# Altium PCB PCB1.PcbDoc (part 1 of 2)
Units mil, origin at the board's own origin, x right, y up, seen from the top; angles counter-clockwise.
Board outline 2600 x 2600 mil, 4 copper layers (Top Layer, Layer 1, Layer 2, Bottom Layer), stack 68.756 mil thick; 81 components, 85 nets, 321 pads, 126 vias.
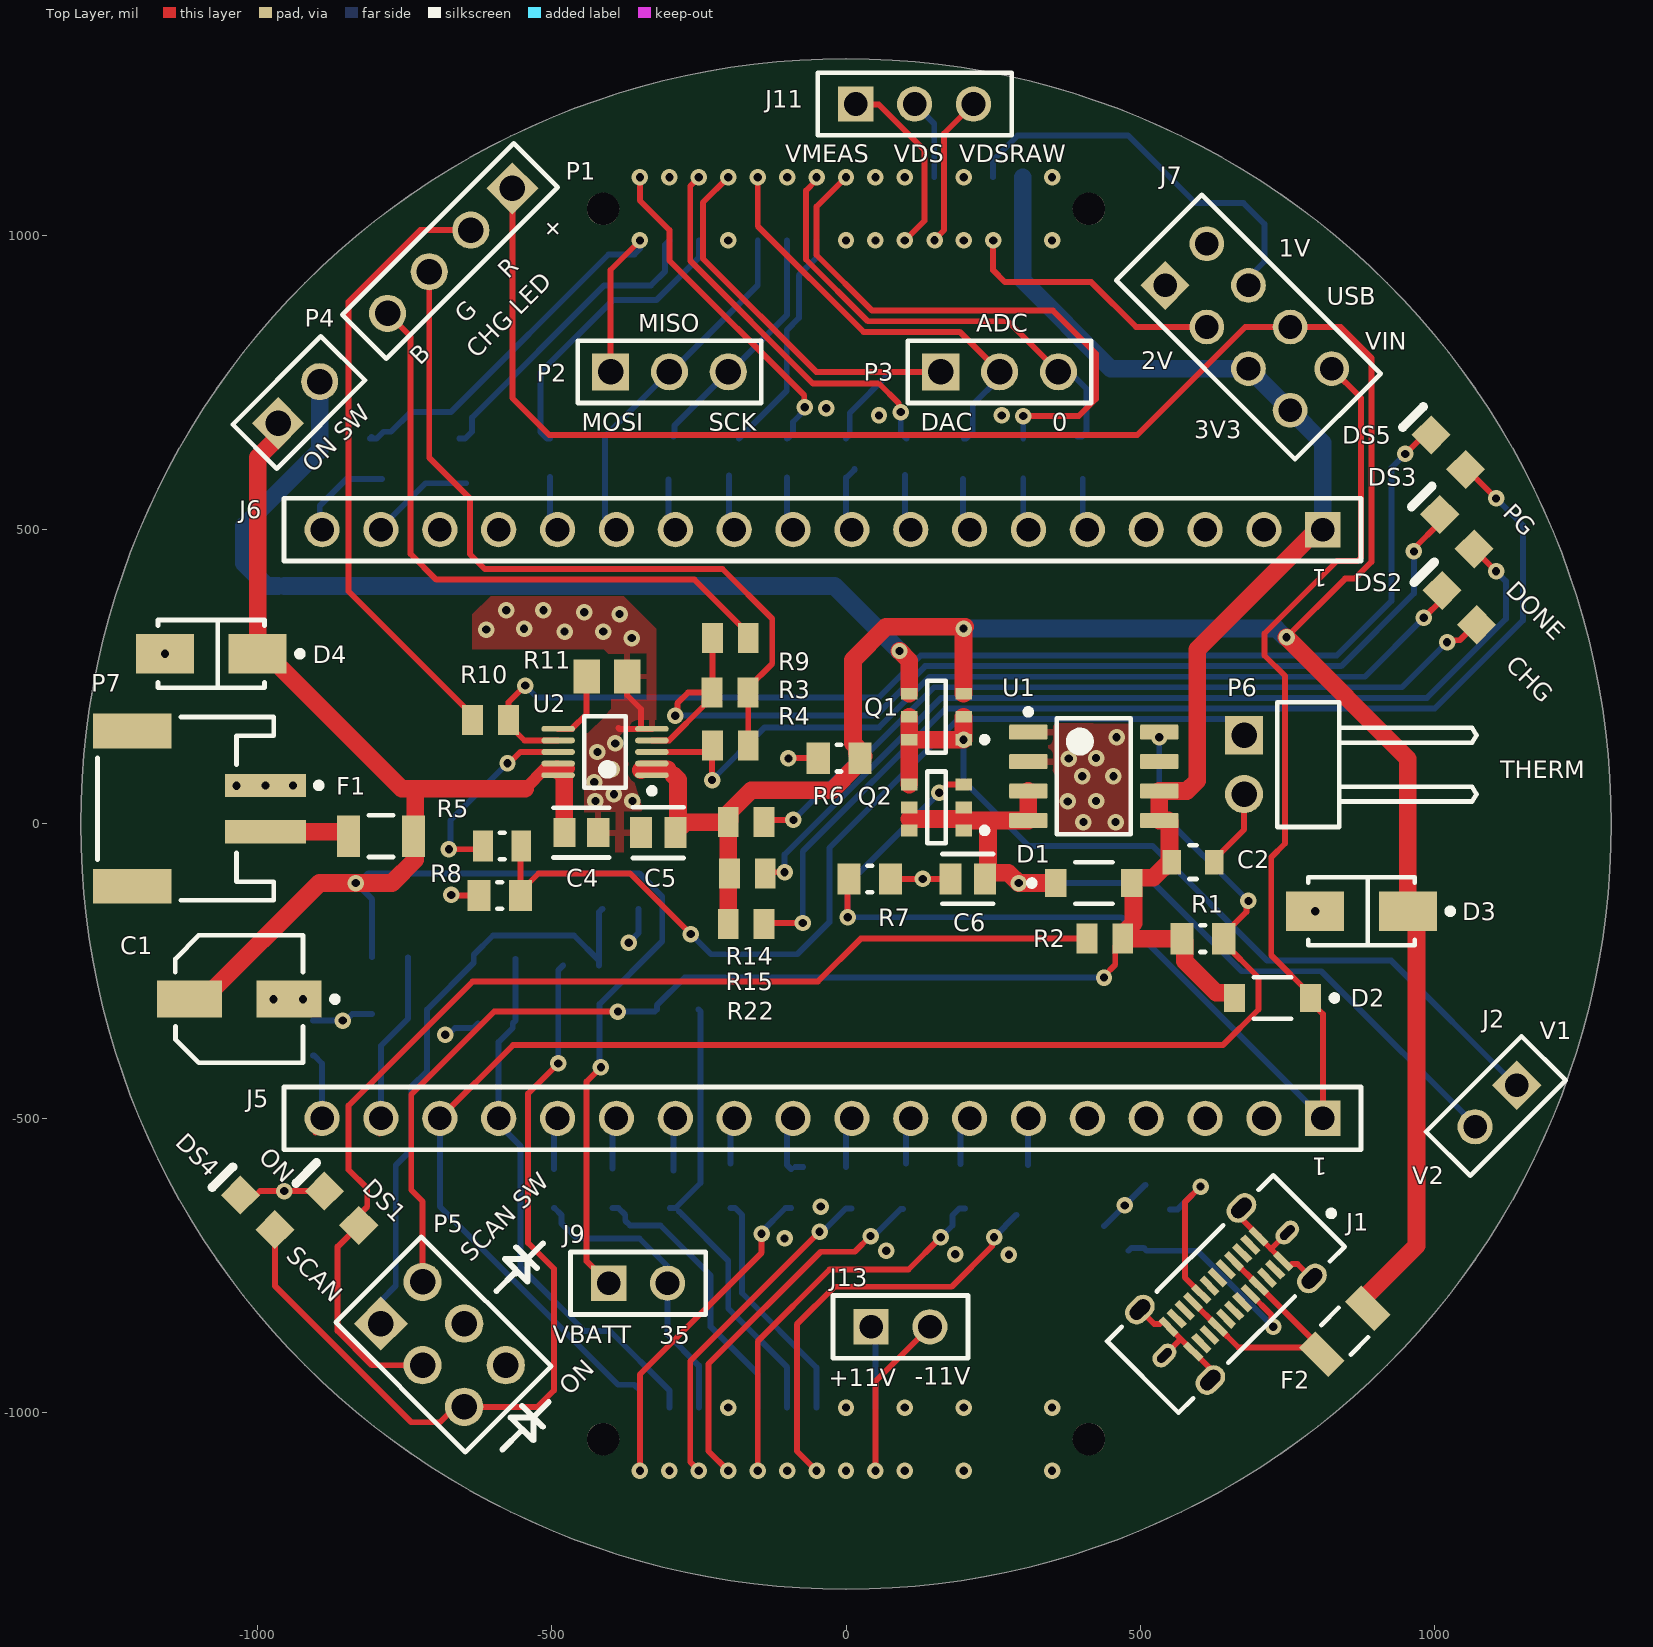
[diagram p0: Top Layer view]
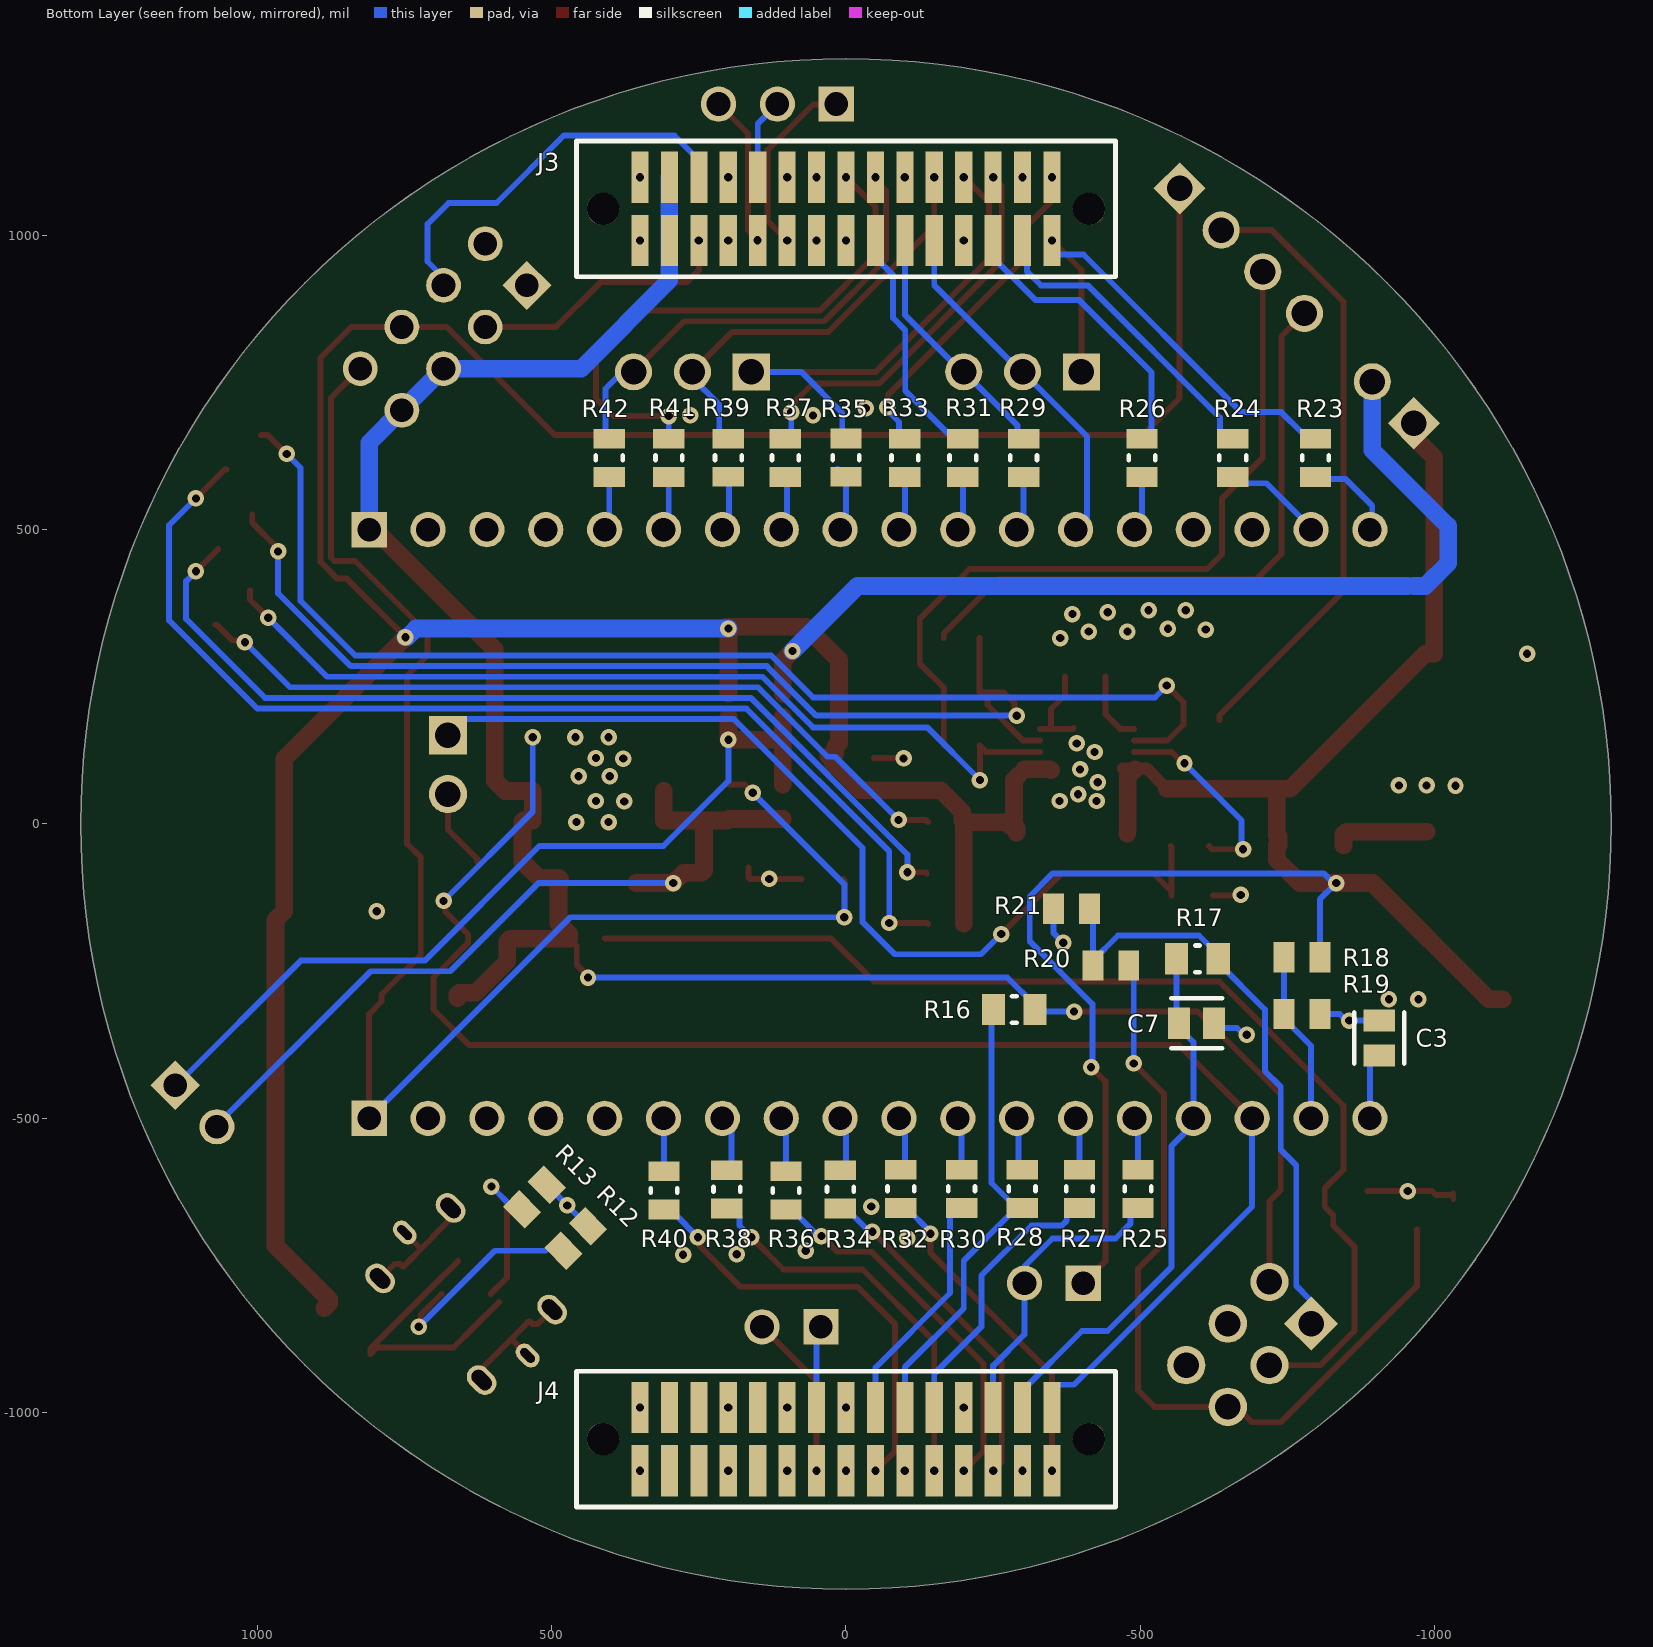
[diagram p1: Bottom Layer view, seen from below]
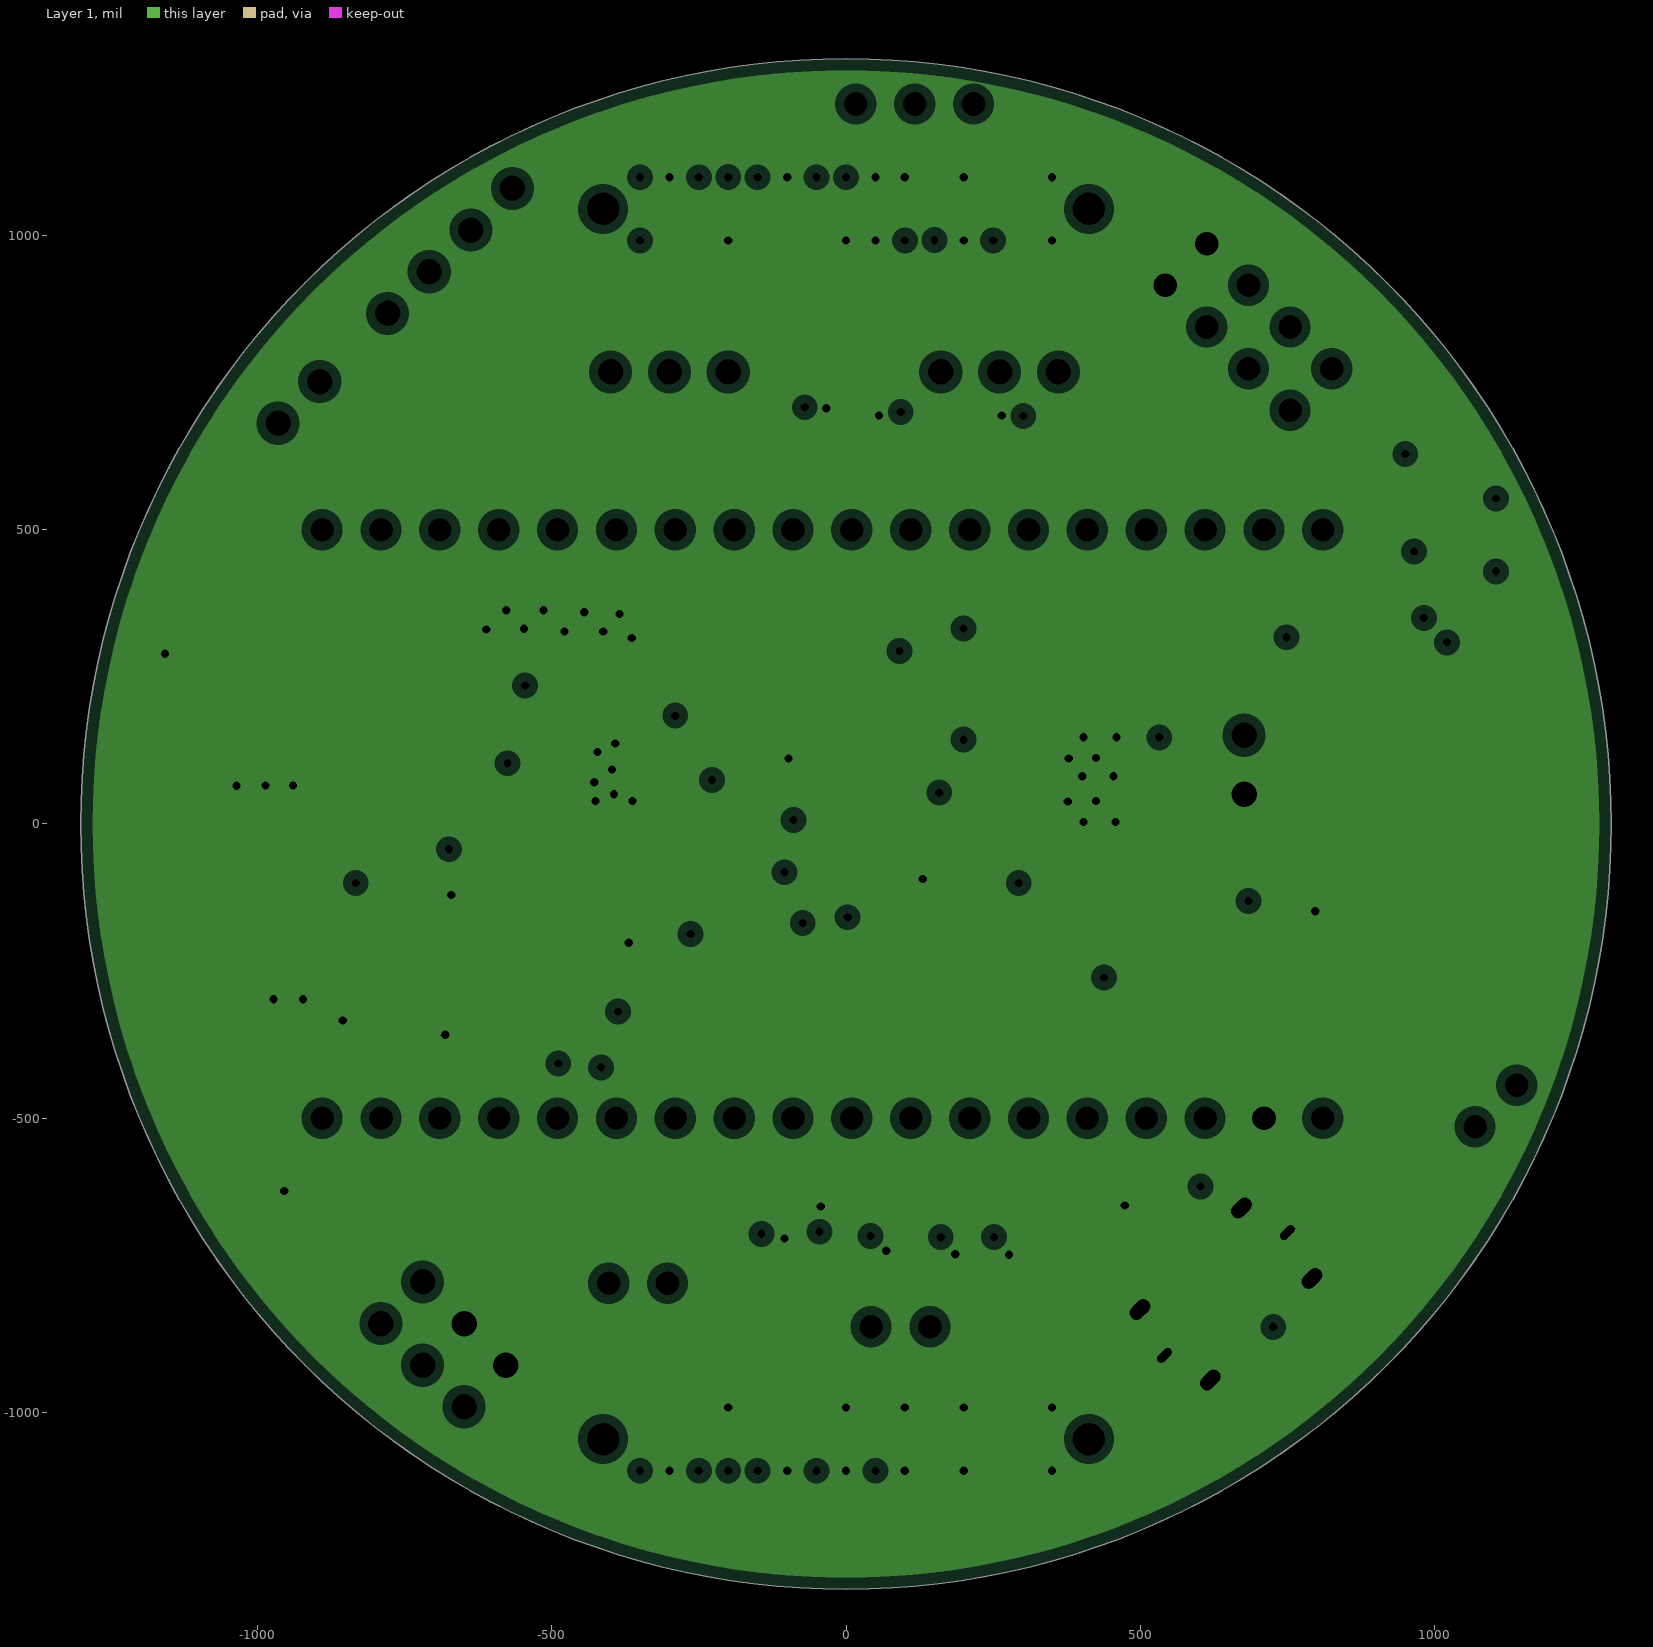
[diagram p2: Layer 1, clearances drawn from the general rule]
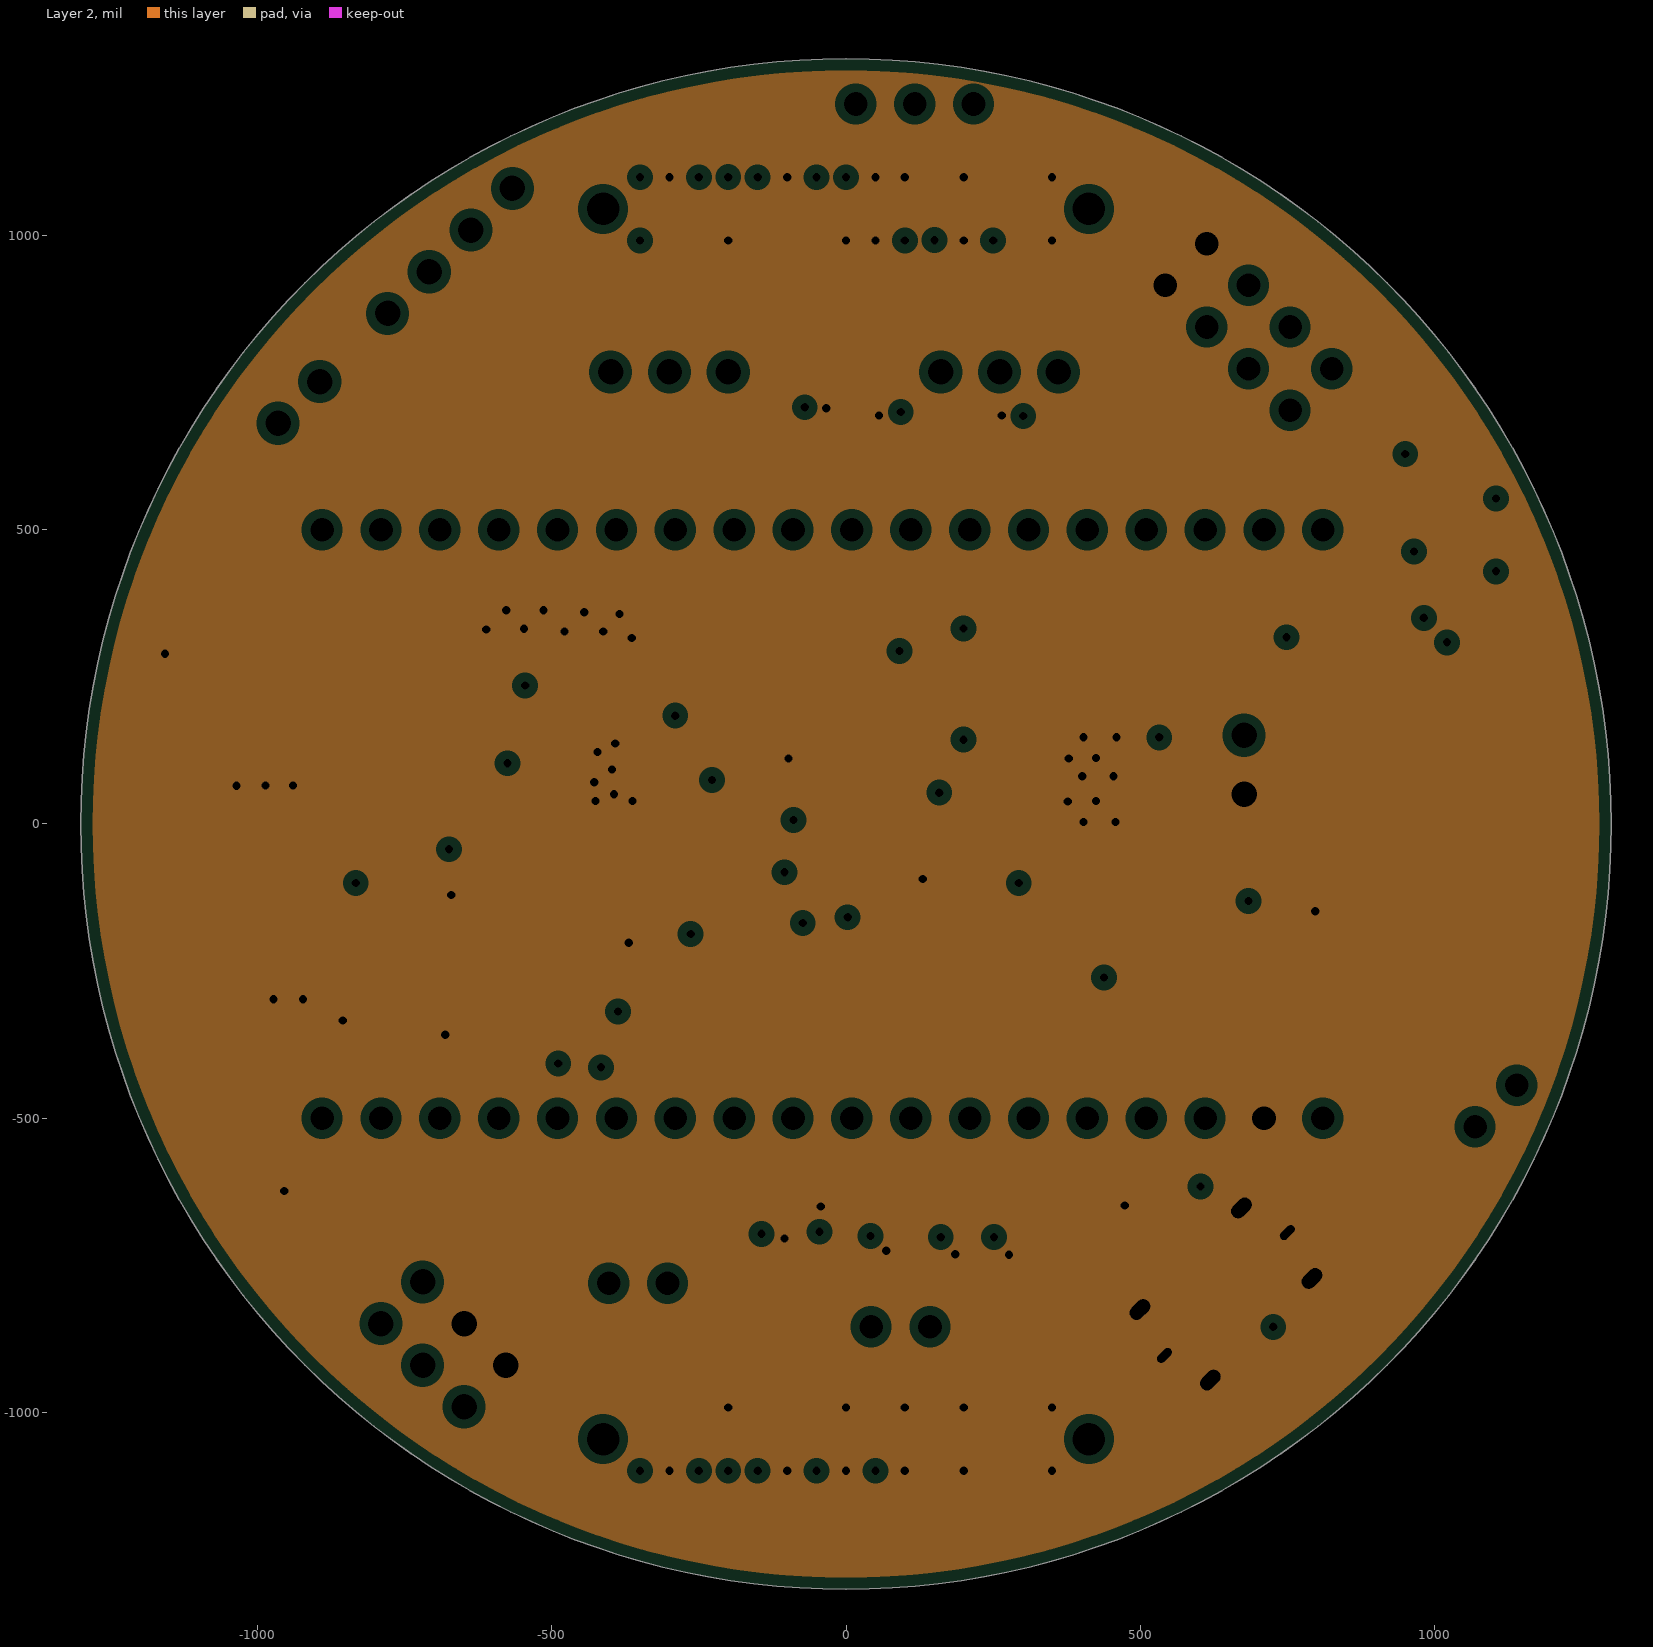
[diagram p3: Layer 2, clearances drawn from the general rule]
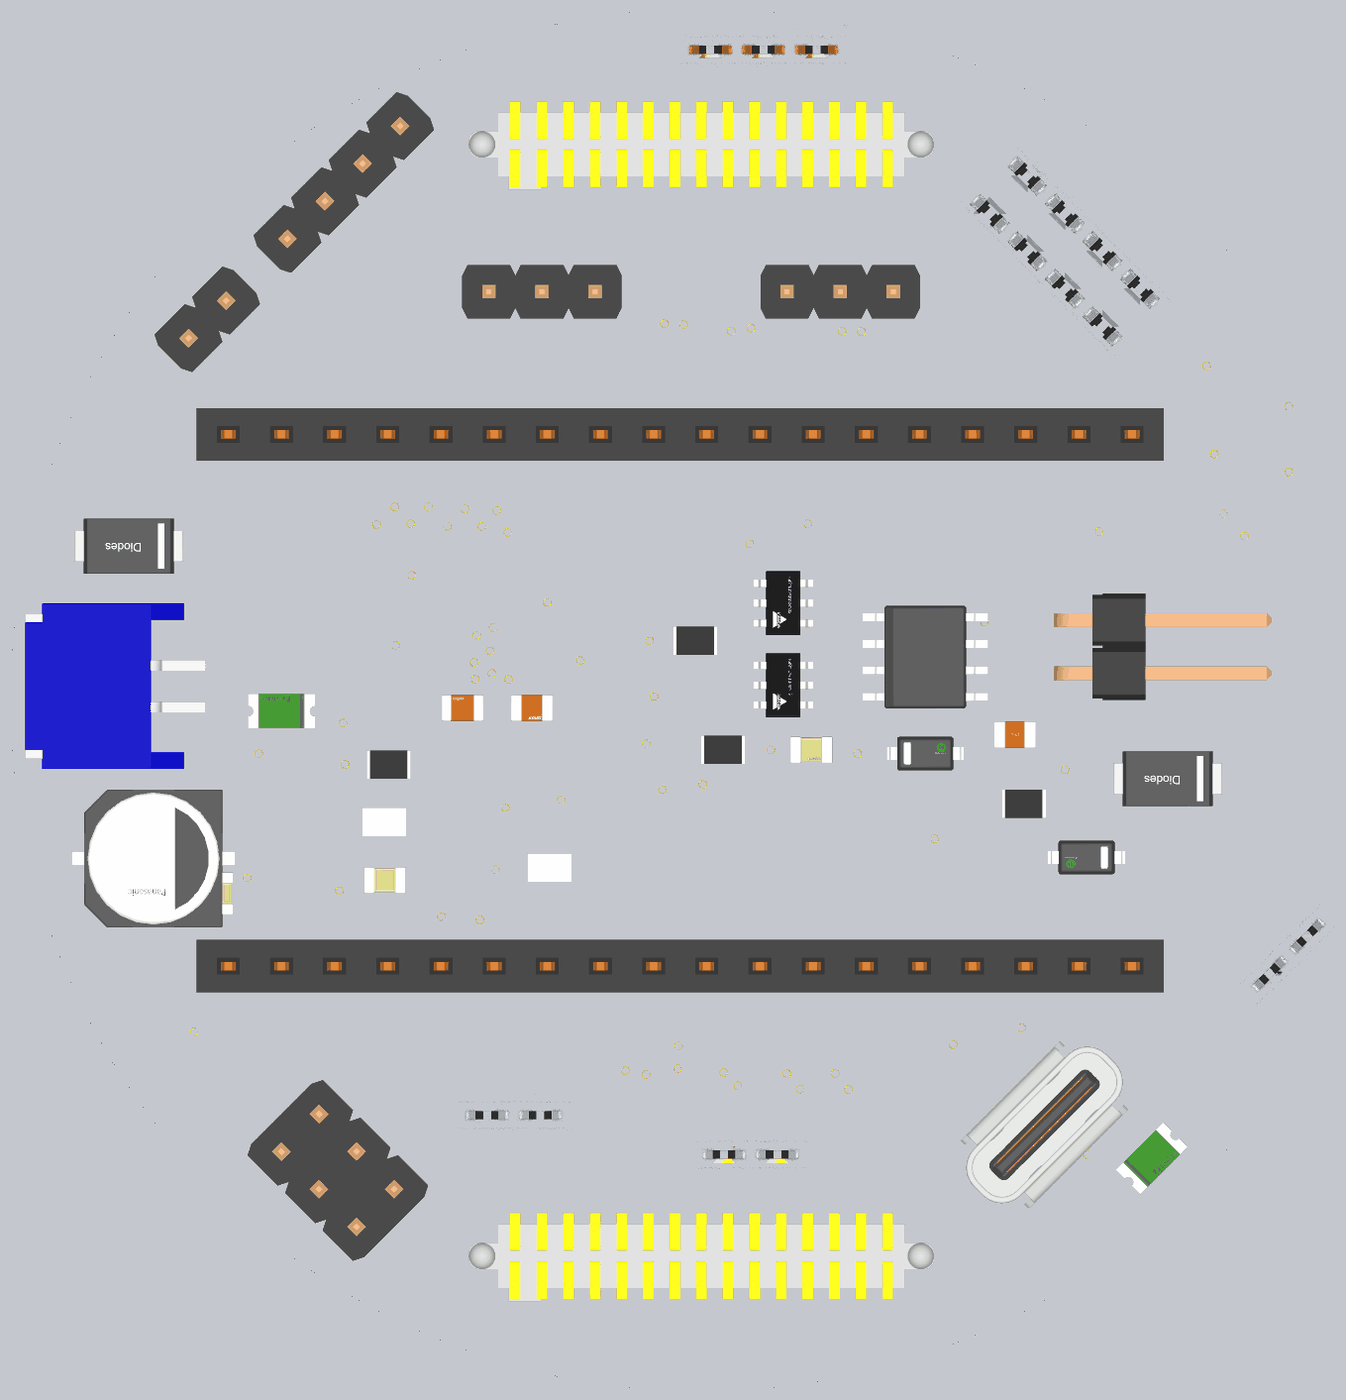
[diagram p4: 3D render of the assembled board from above, using the file's embedded part models]

## Layer stack, top to bottom
Top Solder: solder mask 0.5, Solder Resist, Dk 3.3
Top Layer: signal copper 0.7
Dielectric 1: prepreg 2.8, PP-006, Dk 4.1
Layer 1: plane copper 1.378, net GND
Dielectric1: core 59, FR-4, Dk 4.3
Layer 2: plane copper 1.378, net GND
Dielectric 2: prepreg 2.8, PP-006, Dk 4.1
Bottom Layer: signal copper 0.7
Bottom Solder: solder mask 0.5, Solder Resist, Dk 3.3

## Board outline
-1300,0 ccw(c0,0) 0,-1300 ccw(c0,0) 1300,0 ccw(c0,0) 0,1300 ccw(c0,0)

## Design rules (kind name [scope] priority, off if disabled: settings)
Clearance [All] p1: gap=8 ignorepadtopadclearanceinfootprint=FALSE except(6: SMDPad-SMDPad; 12: Arc-Via Track-Via)
DiffPairsRouting [All] p1: maxlimit=10 minlimit=10 mostfreqgap=10 toplayer_minwidth=10 toplayer_maxwidth=10 toplayer_prefwidth=10 bottomlayer_minwidth=10 bottomlayer_maxwidth=10 bottomlayer_prefwidth=10 maxuncoupledlength=500
HoleSize [All] p1: absolutevalues=TRUE maxlimit=300 minlimit=13 maxpercent=80.000 minpercent=20.000
MinimumAnnularRing [All] p1: minimumring=6
MinimumSolderMaskSliver [All] p1: minsoldermaskwidth=2
PasteMaskExpansion [All] p1: expansion=10
PlaneClearance [All] p1: clearance=15
PlaneConnect [All] p1: pad.planeconnectstyle=Relief pad.reliefexpansion=20 pad.reliefentries=4 pad.reliefconductorwidth=10 pad.reliefairgap=10 via.planeconnectstyle=Direct via.reliefexpansion=20 via.reliefentries=4 via.reliefconductorwidth=10 via.reliefairgap=10
PolygonConnect [All] p1: thpad.connectstyle=Relief thpad.reliefconductorwidth=10 thpad.reliefentries=4 thpad.polygonreliefangle="90 Angle" thpad.airgapwidth=10 smdpad.connectstyle=Relief smdpad.reliefconductorwidth=10 smdpad.reliefentries=4 smdpad.polygonreliefangle="90 Angle" smdpad.airgapwidth=10 via.connectstyle=Direct via.reliefconductorwidth=10 via.reliefentries=4 via.polygonreliefangle="90 Angle" via.airgapwidth=10
RoutingVias [All] p1: holewidth=14 width=28 viastyle="Through Hole" minholewidth=14 minwidth=28 maxholewidth=14 maxwidth=28
SMDNeckDown [All] p1: percent=150.000
SilkToSilkClearance [All] p1: silktosilkclearance=5
SilkToSolderMaskClearance SilkscreenOverComponentPads [IsPad] p1: minsilkscreentomaskgap=7 clearancetoexposedcopper=TRUE
SolderMaskExpansion [All] p1: expansion=10 istentingtop=FALSE
Width [All] p1: maxlimit=30 minlimit=8 preferedwidth=8
22 further rules are at their usual default settings.

## Classes and differential pairs
component class ESP32: 45

## Components (designator, comment, footprint, x,y, rotation, side; value= is the part's Value field where it differs from the comment)
C1 "22uF" FP-FKC-MFG -1030.64,-297.57 r180 top
C2 "15uF" FP-C2012-125-0_2-MFG 589.5,-64.81 r0 top
C3 "100 nF" FP-C0805C-DN-MFG -905.75,-363.47 r270 bottom value="0.10 μF"
C4 "10uF" FP-GRM21B-0_1-IPC_C -449.36,-14.56 r180 top
C5 "4.7 uF" FP-C0805C475K3PACTU-MFG -319.05,-14.56 r0 top
C6 "100 nF" FP-C0805C-DN-MFG 206.64,-93.36 r180 top value="0.10 μF"
C7 "100 nF" FP-C0805C-DN-MFG -595.61,-338.59 r180 bottom value="0.10 μF"
D1 "MBR0530" FP-425-04-MFG 420.94,-100.29 r0 top
D2 "MBR0530" FP-425-04-MFG 724.41,-295.6 r180 top
D3 "SMAJ5.0A-13-F" FP-SMA-MFG 875.78,-148.21 r180 top
D4 "SMAJ5.0A-13-F" FP-SMA-MFG -1078.27,289.07 r180 top
DS1 "HSMD-C170" AVAG-HSMX-C170_V -856.89,-652.78 r135 top
DS2 "HSMD-C170" AVAG-HSMX-C170_V 1042,367.67 r135 top
DS3 "HSMD-C170" AVAG-HSMX-C170_V 1037.88,496.67 r135 top
DS4 "HSMD-C170" AVAG-HSMX-C170_V -999.53,-659.74 r135 top
DS5 "HSMD-C170" AVAG-HSMX-C170_V 1023.21,631.59 r135 top
F1 "1206L150THWR" FP-1206L150THWR-MFG -789.89,-20.59 r180 top value=0.04-0.12Ω
F2 "1206L150THWR" FP-1206L150THWR-MFG 847.13,-861.61 r45 top value=0.04-0.12Ω
J1 "204711-0001" FP-204711-0001-MFG 645.3,-798.39 r225 top
J2 "61300211821" 61300211821 1104,-479 r225 top
J3 "SAMTEC-SFM-115-02-X-D-A" SAMTEC-SFM-115-02-X-D-A 0,1045 r180 bottom locked
J4 "SAMTEC-SFM-115-02-X-D-A" SAMTEC-SFM-115-02-X-D-A 0,-1045 r180 bottom locked
J5 "61301811821" 61301811821 -40,-500 r180 top locked
J6 "61301811821" 61301811821 -40,500 r180 top
J7 "61300821821" 61300821821 683.69,844.28 r315 top
J9 "61300211821" 61300211821 -353.21,-780.1 r0 top
J11 "61300311821" 61300311821 116.57,1223 r0 top
J13 "61300211821" 61300211821 92.6,-854.21 r0 top
P1 "61300411121" 61300411121 -672.66,973.5 r225 top
P2 "61300311121" 61300311121 -300,768.1 r0 top
P3 "61300311121" 61300311121 260.94,768.1 r0 top
P4 "61300211121" 61300211121 -929.41,716.1 r45 top
P5 "61300621121" 61300621121 -684,-884 r315 top
P6 "61300211021" 61300211021 785.23,100.75 r90 top
P7 "S2B-PH-SM4-TB(LF)(SN)" "JST- S2B-PH-SM4-TB(LF)(SN)-2_V" -1122.01,26.16 r270 top
Q1 "SI3493DDV-T1-GE3" FP-C-06593-MFG 153.72,182.29 r180 top
Q2 "SI3493DDV-T1-GE3" FP-C-06593-MFG 153.72,28.13 r180 top
R1 "10k" RESC2013X60X35NL10T20 606.24,-194.76 r180 top
R2 "1k" RESC2013X55X40LL15T20 439.64,-194.76 r0 top
R3 "1k" RESC2013X55X40LL15T20 -197,223.36 r180 top
R4 "1k" RESC2013X55X40LL15T20 -196.49,133.36 r180 top
R5 "0" RESC2013X50X30LL20T20 -584.17,-37.45 r0 top
R6 "10k" RESC2013X60X35NL10T20 -11.8,111.9 r0 top
R7 "10k" RESC2013X60X35NL10T20 40.42,-93.36 r180 top
R8 "10k" RESC2013X60X35NL10T20 -588.27,-121.43 r0 top
R9 "1k" RESC2013X55X40LL15T20 -196.49,315.84 r180 top
R10 "1k" RESC2013X55X40LL15T20 -603.84,176.88 r0 top
R11 "2k" RESC2013X70X40NL20T20 -406.05,250.53 r180 top
R12 "5.1k" RESC2013X60X40LL20T25 459.16,-704.02 r315 bottom
R13 "5.1k" RESC2013X60X40LL20T25 529.37,-633.8 r315 bottom
R14 "1k" RESC2013X55X40LL15T20 -169.58,3.18 r180 top
R15 "1k" RESC2013X55X40LL15T20 -167.6,-83.85 r180 top
R16 "10k" RESC2013X60X35NL10T20 -285.82,-314.97 r180 bottom
R17 "10k" RESC2013X60X35NL10T20 -596.95,-229 r0 bottom
R18 "100k" RESC2013X55X40LL15T20 -774.5,-226.38 r180 bottom
R19 "100k" RESC2013X55X40LL15T20 -774.5,-322.84 r0 bottom
R20 "1k" RESC2013X55X40LL15T20 -449.83,-240.06 r0 bottom
R21 "1k" RESC2013X55X40LL15T20 -383.3,-144.07 r0 bottom
R22 "1k" RESC2013X55X40LL15T20 -169.6,-169.59 r180 top
R23 "100" RESC2013X50X30LL20T20 -797.54,622.06 r90 bottom
R24 "100" RESC2013X50X30LL20T20 -656.99,622.06 r90 bottom
R25 "100" RESC2013X50X30LL20T20 -496.01,-619.79 r90 bottom
R26 "100" RESC2013X50X30LL20T20 -502.69,622.06 r90 bottom
R27 "100" RESC2013X50X30LL20T20 -396.48,-619.79 r90 bottom
R28 "100" RESC2013X50X30LL20T20 -299.37,-619.79 r90 bottom
R29 "100" RESC2013X50X30LL20T20 -301.85,622.06 r90 bottom
R30 "100" RESC2013X50X30LL20T20 -196.49,-619.79 r90 bottom
R31 "100" RESC2013X50X30LL20T20 -198.44,622.06 r90 bottom
R32 "100" RESC2013X50X30LL20T20 -93.07,-619.79 r90 bottom
R33 "100" RESC2013X50X30LL20T20 -100.01,622.06 r90 bottom
R34 "100" RESC2013X50X30LL20T20 9.55,-620.65 r90 bottom
R35 "100" RESC2013X50X30LL20T20 0,622.39 r90 bottom
R36 "100" RESC2013X50X30LL20T20 102.01,-622.53 r90 bottom
R37 "100" RESC2013X50X30LL20T20 103,622.06 r90 bottom
R38 "100" RESC2013X50X30LL20T20 202.44,-620.65 r90 bottom
R39 "100" RESC2013X50X30LL20T20 200,622.13 r90 bottom
R40 "100" RESC2013X50X30LL20T20 308.99,-622.53 r90 bottom
R41 "100" RESC2013X50X30LL20T20 301.03,622.06 r90 bottom
R42 "100" RESC2013X50X30LL20T20 402.17,622.06 r90 bottom
U1 "TPS76733QDR" D0008A_M 420.94,81.06 r0 top
U2 "MCP73833-AMI/UN" MSOP-UN10_L -409.37,122.3 r180 top

## Footprints (in the part's own frame and the unit in brackets; to place one, negate y for a bottom-side part, rotate by r counter-clockwise, add the part's x,y. Pads: shape width x height; smd on the part's side, far side on the other; paste and mask are expansions set on the pad)
61300211021 [mm] "Pin Header, pitch 2.54 mm, THT, Angled, single row, 2p"
  rect 1.65x1.65 hole 1.1: 1(1.27,2.77)
  round 1.65 hole 1.1: 2(-1.27,2.77)
  silkscreen extent -2.69,-7.27 2.69,1.35, body extent -2.54,-7.27 2.54,3.09, height 2.58
61300211121 [mm] "Pin Header, pitch 2.54 mm, THT, Vertical, single row, 2p"
  rect 1.6x1.6 hole 1.1: 1(-1.27,0)
  round 1.6 hole 1.1: 2(1.27,0)
  silkscreen extent -2.69,-1.35 2.69,1.35, body extent -2.54,-1.27 2.54,1.27, height 8.57
61300211821 [mm] "Socket Header, Pitch 2.54 mm, THT, Vertical, single row, 2p"
  rect 1.52x1.52 hole 1.02: 1(-1.27,0)
  round 1.52 hole 1.02: 2(1.27,0)
  silkscreen extent -2.91,-1.35 2.91,1.35, body extent -2.79,-1.25 2.79,1.25, height 8.55
61300311121 [mm] "Pin Header, pitch 2.54 mm, THT, Vertical, single row, 3p"
  rect 1.6x1.6 hole 1.1: 1(-2.54,0)
  round 1.6 hole 1.1: 2(0,0) 3(2.54,0)
  silkscreen extent -3.96,-1.35 3.96,1.35, body extent -3.81,-1.27 3.81,1.27, height 8.57
61300311821 [mm] "Socket Header, Pitch 2.54 mm, THT, Vertical, single row, 3p"
  rect 1.52x1.52 hole 1.02: 1(-2.54,0)
  round 1.52 hole 1.02: 2(0,0) 3(2.54,0)
  silkscreen extent -4.19,-1.35 4.19,1.35, body extent -4.06,-1.25 4.06,1.25, height 8.55
61300411121 [mm] "Pin Header, pitch 2.54 mm, THT, Vertical, single row, 4p"
  rect 1.6x1.6 hole 1.1: 1(-3.81,0)
  round 1.6 hole 1.1: 2(-1.27,0) 3(1.27,0) 4(3.81,0)
  silkscreen extent -5.23,-1.35 5.23,1.35, body extent -5.08,-1.27 5.08,1.27, height 8.57
61300621121 [mm] "Pin Header, pitch 2.54 mm, THT, Vertical, dual row, 6p"
  rect 1.65x1.65 hole 1.1: 1(-2.54,-1.27)
  round 1.65 hole 1.1: 2(-2.54,1.27) 3(0,-1.27) 4(0,1.27) 5(2.54,-1.27) 6(2.54,1.27)
  silkscreen extent -3.96,-2.62 3.96,2.62, body extent -3.81,-2.54 3.81,2.54, height 8.59
61300821821 [mm] "Socket Header, Pitch 2.54 mm, THT, Vertical, dual row, 8p"
  rect 1.5x1.5 hole 1.02: 1(-3.81,-1.27)
  round 1.5 hole 1.02: 2(-3.81,1.27) 3(-1.27,-1.27) 4(-1.27,1.27) 5(1.27,-1.27) 6(1.27,1.27) 7(3.81,-1.27) 8(3.81,1.27)
  silkscreen extent -5.46,-2.62 5.46,2.62, body extent -5.33,-2.54 5.33,2.54, height 8.45
61301811821 [mm] "Socket Header, Pitch 2.54 mm, THT, Vertical, single row, 18p"
  rect 1.52x1.52 hole 1.02: 1(-21.59,0)
  round 1.52 hole 1.02: 2(-19.05,0) 3(-16.51,0) 4(-13.97,0) 5(-11.43,0) 6(-8.89,0) 7(-6.35,0) 8(-3.81,0) 9(-1.27,0) 10(1.27,0) 11(3.81,0) 12(6.35,0) 13(8.89,0) 14(11.43,0) 15(13.97,0) 16(16.51,0) 17(19.05,0) 18(21.59,0)
  silkscreen extent -23.24,-1.35 23.24,1.35, body extent -23.11,-1.25 23.11,1.25, height 8.55
AVAG-HSMX-C170_V [mm] "SMD, 2-Leads, Body 2x1.25mm, Height 0.8mm"
  rect 1.2x1.2 smd: 1(-1.05,0) 2(1.05,0)
  silkscreen extent 2.15,-0.62 2.15,0.62, body extent -1,-0.63 1,0.63, height 0.8
D0008A_M [mm] "SOIC, 8-Leads, Body 5x4mm, Pitch 1.27mm, IPC Low Density"
  rrect15% 1.65x0.65 smd: 1(-2.825,1.905) 2(-2.825,0.635) 3(-2.825,-0.635) 4(-2.825,-1.905) 5(2.825,-1.905) 6(2.825,-0.635) 7(2.825,0.635) 8(2.825,1.905)
  silkscreen extent -2.95,-2.5 1.6,2.9, body extent -3,-2.45 3,2.45, height 1.63
FP-425-04-MFG [mil]
  rect 36x48 smd paste+0 mask+0: 1(-64.5,0) 2(64.5,0)
  silkscreen extent -110,-35 32,35, body extent -86,-39 86,39, height 10
FP-1206L150THWR-MFG [mm]
  rect 1x1.8 smd paste+0 mask+0: 1(-1.4,0) 2(1.4,0)
  silkscreen extent -0.53,-0.9 0.53,0.9, body extent -2,-1 2,1, height 0.25
FP-204711-0001-MFG [mm]
  rrect100% 1.4x1 hole 0.6 slot 1 at 0 deg paste-1000 mask+0: 1(-3.1,2.15) 2(3.1,2.15) 5(-3.1,-2.15) 6(3.1,-2.15)
  rrect100% 1.15x0.75 hole 0.35 slot 0.75 at 0 deg paste-1000 mask+0: 3(-3.75,0) 4(3.75,0)
  rect 0.3x0.95 smd paste+0 mask+0: A1(-2.75,0.755) A2(-2.25,0.755) A3(-1.75,0.755) A4(-1.25,0.755) A5(-0.75,0.755) A6(-0.25,0.755) A7(0.25,0.755) A8(0.75,0.755) A9(1.25,0.755) A10(1.75,0.755) A11(2.25,0.755) A12(2.75,0.755) B1(2.75,-0.755) B2(2.25,-0.755) B3(1.75,-0.755) B4(1.25,-0.755) B5(0.75,-0.755) B6(0.25,-0.755) B7(-0.25,-0.755) B8(-0.75,-0.755) B9(-1.25,-0.755) B10(-1.75,-0.755) B11(-2.25,-0.755) B12(-2.75,-0.755)
  silkscreen extent -5.79,-2.18 5.07,2.18, body extent -5.17,-2.75 5.17,2.75, height 0.25
FP-C0805C475K3PACTU-MFG [mm]
  rect 0.95x1.35 smd paste+0 mask+0: 1(-0.75,0) 2(0.75,0)
  silkscreen extent -1.1,-1.1 1.1,1.1, body extent -1.4,-0.85 1.4,0.85, height 0.25
FP-C0805C-DN-MFG [mm]
  rect 0.95x1.35 smd paste+0 mask+0: 1(-0.75,0) 2(0.75,0)
  silkscreen extent -1.1,-1.07 1.1,1.07, body extent -1,-0.63 1,0.63, height 0.88
FP-C2012-125-0_2-MFG [mm]
  rect 0.8x1.05 smd paste+0 mask+0: 1(-0.925,0) 2(0.925,0)
  silkscreen extent -0.15,-0.73 0.15,0.73, body extent -1.42,-0.82 1.42,0.82, height 0.25
FP-C-06593-MFG [mil]
  rect 28x20 smd paste+0 mask+0: 1(-46,39) 2(-46,0) 3(-46,-39) 4(46,-39) 5(46,0) 6(46,39)
  silkscreen extent -87,-61 16,61, body extent -64,-65 64,65, height 10
FP-FKC-MFG [mm]
  rect 2.8x1.6 smd paste+0 mask+0: 1(-2.15,0) 2(2.15,0)
  silkscreen extent -4.25,-2.75 2.76,2.75, body extent -3.8,-3 3.8,3, height 0.25
FP-GRM21B-0_1-IPC_C [mil]
  rect 37.71x49.69 smd paste+0 mask+0: 1(-28.63,0) 2(28.63,0)
  silkscreen extent -47,-42 47,42, body extent -51,-31 51,31, height 10
FP-SMA-MFG [mm]
  rect 2.5x1.7 smd paste+0 mask+0: 1(-2,0) 2(2,0)
  silkscreen extent -3.95,-1.46 2.3,1.46, body extent -3.35,-1.56 3.35,1.56, height 0.25
"JST- S2B-PH-SM4-TB(LF)(SN)-2_V" [mm] "SMD, 2-Leads, Body 7.9x7.6mm, Pitch 2mm"
  rect 1x3.5 smd: 1(-1,3.45) 2(1,3.45)
  rect 1.5x3.4 smd: MP1(-3.35,-2.3) MP2(3.35,-2.3)
  silkscreen extent -3.95,-3.8 3.95,5.88, body extent -3.95,-3.8 3.95,4.8, height 5.6
MSOP-UN10_L [mm] "TSSOP, 10-Leads, Body 3x3mm, Pitch 0.5mm, IPC High Density"
  oval 1.45x0.25 smd: 1(-2.025,1) 2(-2.025,0.5) 3(-2.025,0) 4(-2.025,-0.5) 5(-2.025,-1) 6(2.025,-1) 7(2.025,-0.5) 8(2.025,0) 9(2.025,0.5) 10(2.025,1)
  silkscreen extent -2.15,-1.55 0.9,1.8, body extent -1.55,-1.55 1.55,1.55, height 1.1
RESC2013X50X30LL20T20 [mm] "Chip Resistor, 2-Leads, Body 2.00x1.25mm, IPC High Density"
  rect 0.85x1.35 smd: 1(-0.825,0) 2(0.825,0)
  silkscreen extent -0.1,-0.58 0.1,0.58, body extent -1.1,-0.72 1.1,0.72, height 0.5
RESC2013X55X40LL15T20 [mm] "Chip Resistor, 2-Leads, Body 2.00x1.25mm, IPC High Density"
  rect 0.9x1.3 smd: 1(-0.775,0) 2(0.775,0)
  body extent -1.07,-0.7 1.07,0.7, height 0.55
RESC2013X60X35NL10T20 [mm] "Chip Resistor, 2-Leads, Body 2.1x1.35mm, IPC Medium Density"
  rect 1x1.35 smd: 1(-0.9,0) 2(0.9,0)
  silkscreen extent -0.1,-0.58 0.1,0.58, body extent -1.05,-0.68 1.05,0.67, height 0.6
RESC2013X60X40LL20T25 [mm] "Chip Resistor, 2-Leads, Body 2.00x1.25mm, IPC High Density"
  rect 1x1.35 smd: 1(-0.75,0) 2(0.75,0)
  body extent -1.1,-0.72 1.1,0.72, height 0.6
RESC2013X70X40NL20T20 [mm] "Chip Resistor, 2-Leads, Body 2.2x1.35mm, IPC Medium Density"
  rect 1.15x1.45 smd: 1(-0.875,0) 2(0.875,0)
  body extent -1.1,-0.72 1.1,0.72, height 0.7
SAMTEC-SFM-115-02-X-D-A [mm]
  rect 0.74x2.22 smd mask+0: 1(-8.89,1.365) 2(-8.89,-1.365) 3(-7.62,1.365) 4(-7.62,-1.365) 5(-6.35,1.365) 6(-6.35,-1.365) 7(-5.08,1.365) 8(-5.08,-1.365) 9(-3.81,1.365) 10(-3.81,-1.365) 11(-2.54,1.365) 12(-2.54,-1.365) 13(-1.27,1.365) 14(-1.27,-1.365) 15(0,1.365) 16(0,-1.365) 17(1.27,1.365) 18(1.27,-1.365) 19(2.54,1.365) 20(2.54,-1.365) 21(3.81,1.365) 22(3.81,-1.365) 23(5.08,1.365) 24(5.08,-1.365) 25(6.35,1.365) 26(6.35,-1.365) 27(7.62,1.365) 28(7.62,-1.365) 29(8.89,1.365) 30(8.89,-1.365)
  round 1.4 hole 1.4 unplated: ""(-10.478,0) ""(10.478,0)
  silkscreen extent -11.63,-2.93 11.63,2.93, body extent -11.11,-2.16 11.11,2.04, height 4.7

## Part data
C1: library part CMP-05427-000063-1, "CAP ALUM 22UF 20% 35V SMD", Case/Package=Radial, Dielectric Material=Aluminium, ESR (Equivalent Series Resistance)=700mR, Leakage Current=3uA, Max Operating Temperature=105°C, Min Operating Temperature=-55°C, Package Quantity=1, Ripple Current=160mA, Tolerance=20%, Voltage=35V, Capacitance=22uF, Construction=Cylindrical, Contact Plating=Tin, Diameter=5mm, Height=5.8mm, Height - Seated (Max)=0.228inch, Impedance=700mR, Lead Free="Lead Free", Length=5.8mm, Life (Hours)=2000Hour, Material=Aluminium, Mount="Surface Mount", Number of Pins=2, Packaging="Tape and Reel", Radiation Hardening=No, REACH SVHC="No SVHC", Ripple Current (AC)=160mA, RoHS Compliant=Yes, Series=FK, Termination=SMD/SMT, Voltage Rating=35V, Voltage Rating (DC)=35V, Width=6.5mm
C2: library part CMP-08246-007094-1, "Multilayer Ceramic Capacitors 15μF ±20% 25V JB SMD 0805", Case Code (Imperial)=0805, Case Code (Metric)=2012, Dielectric Material=Ceramic, Max Operating Temperature=85°C, Min Operating Temperature=-25°C, Package Quantity=2000, Tolerance=20%, Voltage Rating=25V, Capacitance=15uF, Case/Package=0805, Lead Free="Lead Free", Length=0.079inch, Mount="Surface Mount", Packaging="Tape and Reel", RoHS Compliant=Yes, Series=C, Thickness=0.057inch, Voltage Rating (DC)=25V, Width=0.049inch
C3 C6 C7: library part CMP-2007-00279-2, "CAP CER 0.1UF 50V X7R 0805", Capacitance="0.10 μF", Manufacturer=KEMET, Manufacturer Part Number=C0805C104K5RACTU, Package=C0805C-DN, Temperature="-55°C to +125°C", Temperature Characteristic=X7R, Temperature Coefficient=30ppm/°C, Temperature Range High=+125°C, Temperature Range Low=-55°C, Tolerance=0.1, Voltage Rating="50 V", Automotive=No, Category=Cap, ComponentLink2Description=Datasheet, ComponentLink2URL=https://content.kemet.com/datasheets/KEM_C1003_C0G_SMD.pdf, Device Class L1="Passive Components", Device Class L2=Capacitors, Device Class L3="Ceramic Capacitors", Digikey Description="CAP CER 0.1UF 50V X7R 0805", Height=0.88mm, Ipc Land Pattern Name=CAPC200125X78, Lead Free=Yes, Material=Ceramic, Mouser Description="Cap Ceramic 0.1uF 50V X7R 10% SMD 2.0 x 1.2 mm 125 C Paper T/R", Octopart=https://octopart.com/c0805c104k5ractu-kemet-143926, RoHS=TRUE
C4: library part CMP-2007-03453-2, "Chip Multilayer Ceramic Capacitors for General Purpose, 0805, 10uF, X5R, 15%, 10%, 16V", Case Code (Imperial)=0805, Case Code (Metric)=2012, Dielectric=X5R, Max Operating Temperature=85°C, Min Operating Temperature=-55°C, Package Quantity=1, Tolerance=10%, Voltage=16V, Capacitance=10uF, Case/Package=0805, Depth=1.25mm, Height=1.25mm, Lead Free="Lead Free", Length=2mm, Material=Ceramic, Mount="Surface Mount", Packaging="Tape and Reel", Radiation Hardening=No, REACH SVHC="No SVHC", Termination=SMD/SMT, Thickness=0.053inch, Voltage Rating=16V, Voltage Rating (DC)=16V, Width=1.25mm
C5: library part CMP-2007-01010-2, "CAP CER 4.7UF 25V X5R 0805", Capacitance=4.7uF, Case Code (Imperial)=0805, Case Code (Metric)=2012, Dielectric=X5R, Dielectric Material=Ceramic, Max Operating Temperature=85°C, Min Operating Temperature=-55°C, Package Quantity=2500, Tolerance=10%, Voltage=25V, Case/Package=0805, Construction=Flat, Contact Plating=Tin, Depth=1.25mm, Dissipation Factor=5%, Height=1.25mm, Lead Free="Lead Free", Length=2mm, Mount=PCB, Number of Pins=2, Packaging="Tape and Reel", Radiation Hardening=No, REACH SVHC="No SVHC", RoHS Compliant=Yes, Series=C0805C, Termination=SMD/SMT, Voltage Rating (DC)=25V, Width=1.2mm
D1 D2: library part CMP-2000-05113-2, "DIODE SCHOTTKY 30V 500MA SOD123", Average Rectified Current=500mA, Forward Voltage=430mV, Max Forward Surge Current (Ifsm)=5.5A, Max Operating Temperature=150°C, Max Repetitive Reverse Voltage (Vrrm)=30V, Max Reverse Leakage Current=130uA, Min Operating Temperature=-65°C, Package Quantity=1, Contact Plating=Tin, Current Rating=500mA, Element Configuration=Single, Forward Current=500mA, Height=1.03mm, Lead Free="Lead Free", Length=2.7mm, Max Reverse Voltage (DC)=30V, Max Surge Current=5.5A, Mount="Surface Mount", Number of Pins=2, Output Current=500mA, Packaging="Tape and Reel", Peak Non-Repetitive Surge Current=5.5A, Peak Reverse Current=130uA, Polarity=Standard, Radiation Hardening=No, REACH SVHC="No SVHC", Voltage Rating (DC)=30V, Weight=0.03g, Width=1.6mm
D3 D4: library part CMP-12828-000007-1, "TVS DIODE 5V 9.2V SMA", Breakdown Voltage=6.4V, Clamping Voltage=9.2V, Manufacturer="Diodes Inc.", Max Junction Temp=+150°C, Package=SMA, Peak Pulse Current=43.5A, Peak Pulse Power=400W, Reverse Standoff Voltage=5V, Temperature="-55°C to +150°C", Temperature Range Low=-55°C, Automotive=No, Category=Diode, ComponentLink2Description=Datasheet, ComponentLink2URL=https://www.diodes.com/assets/Datasheets/ds19005.pdf, Device Class L1="Circuit Protection", Device Class L2="TVS Diodes", Device Class L3=unset, Digikey Description="TVS DIODE 5V 9.2V SMA", Direction=Unidirectional, Footprint Url=https://www.diodes.com/assets/Package-Files/SMA.pdf, Height=2.4mm, Lead Free=Yes, Manufacturer Part Number=SMAJ5.0A-13-F, Mouser Description="TVS DIODE 5V 9.2V SMA", Number of Channels=1, Octopart=https://octopart.com/smaj5.0a-13-f-diodes+inc.-350158, RoHS=TRUE, Standoff Height=0.05mm, Temperature Range High=+150°C
DS1 DS2 DS3 DS4 DS5: library part CMP-2000-06421-1, "LED Uni-Color Orange, 52 mW, 20 mA, -40 to 85 degC, 2-Pin SMD, RoHS, Tape and Reel", Forward Current If=20mA, Forward Voltage=2.2V, LED Colour=Orange, Manufacturer=Avago, Operating Temperature Max=85°C, Operating Temperature Min=-30°C, Operating Temperature Range=-30°Cto+85°C, Opto Case Style=SMD, Package Description="2-Pin Surface Mount Device, Body 2 x 1.25 mm, Height 0.8 mm", Package Reference=HSMX-C170, Power Dissipation Pd=52mW, Storage Temperature Min=-40°C, Bulb Size=1.25mmx1.4mm, Datasheet URL=http://docs.avagotech.com/docs/AV02-0551EN, Datasheet Version=03/2012, Dominant Wavelength=604nm, External Depth=0.8mm, External Length / Height=2mm, External Width=1.25mm, Forward Current If Max=20mA, Forward Voltage VF Max=2.2V, LED Mounting=SMD, LED Type=Standard, Lens Shape=Rectangular, Light Area Height=1.25mm, Luminous Intensity=8mcd, Luminous Intensity Typ=8mcd, Manufacturer URL=http://www.avagotech.com/, Mounting Technology=SurfaceMount, Mounting Type=SMD, MSL=MSL2A-4weeks, No. of Pins=2, Opto Mounting Orientation=Top, Package / Case=SMD, Peak Forward Current=20mA, Peak Wavelength=605nm, PIV Max=5V, Storage Temperature Max=85°C, SVHC=NoSVHC(19-Dec-2012), Viewing Angle=170°, Voltage Vf Typ=2.2V, Wavelength Typ=605nm
F1 F2: library part CMP-08606-000062-1, "PTC RESET FUSE 8V 1.5A 1206", Ambient Temperature Range High=+85°C, Ambient Temperature Range Low=-40°C, Current Rating=100A, Hold Current=1.5A, Manufacturer="Littelfuse Inc", Package=0, Resistance=0.04-0.12Ω, Temperature="-40°C to +85°C", Trip Current=3A, Voltage Rating=8V, Automotive=No, Category=Fuse, ComponentLink2Description=Datasheet, ComponentLink2URL=https://www.littelfuse.com/~/media/electronics/datasheets/resettable_ptcs/littelfuse_ptc_1206l_datasheet.pdf.pdf, Device Class L1="Circuit Protection", Device Class L2="PTC Resettable Fuses", Device Class L3=unset, Digikey Description="PTC RESET FUSE 8V 1.5A 1206", Height=1mm, Lead Free=Yes, Manufacturer Part Number=1206L150THWR, Mouser Description="Resettable Fuses - PPTC PTC 6V 1206 1.5A POLYFUSE SMD THIN", Octopart=https://octopart.com/1206l150thwr-littelfuse-11800143, RoHS=TRUE, Temperature Range High=+85°C, Temperature Range Low=-40°C, Trip Time=0.3s
J1: library part CMP-04767-000011-1, "USB VERTICAL TYPE C 3.1"
J2 J9 J13: library part CMP-1502-01314-1, "THT Vertical Socket Header WR-PHD, Pitch 2.54 mm, Single Row, 2 pins", Contact Resistance=20mOhm, Manufacturer="Wurth Elektronik", Operating Temperature=-40to125degC, Rated Current=3A, Withstanding Voltage=500VAC, Working Voltage=250VAC, Datasheet URL=https://katalog.we-online.de/em/datasheet/6130xx11821.pdf, Gender=Female, Manufacturer URL=http://www.we-online.de, Mounting Technology=THT, Orientation=Vertical, Package Reference=61300211821, Packaging=Tray, Part Number=61300211821, Pin Number=2, Pitch=2.54mm, Publisher=WurthElektronik, Row Number=Single
J3 J4: Package=None, Availability=Unavailable, MF="Samtec Inc.", MP=SAMTEC-SFM-115-02-X-D-A, Price=None, System=Connector
J5 J6: library part CMP-1502-01346-1, "THT Vertical Socket Header WR-PHD, Pitch 2.54 mm, Single Row, 18 pins", Contact Resistance=20mOhm, Manufacturer="Wurth Elektronik", Operating Temperature=-40to125degC, Rated Current=3A, Withstanding Voltage=500VAC, Working Voltage=250VAC, Datasheet URL=https://katalog.we-online.de/em/datasheet/6130xx11821.pdf, Gender=Female, Manufacturer URL=http://www.we-online.de, Mounting Technology=THT, Orientation=Vertical, Package Reference=61301811821, Packaging=Tray, Part Number=61301811821, Pin Number=18, Pitch=2.54mm, Publisher=WurthElektronik, Row Number=Single
J7: library part CMP-1502-01329-1, "THT Vertical Socket Header WR-PHD, Pitch 2.54 mm, Dual Row, 8 pins", Contact Resistance=20mOhm, Manufacturer="Wurth Elektronik", Operating Temperature=-40to125degC, Rated Current=3A, Withstanding Voltage=500VAC, Working Voltage=250VAC, Datasheet URL=https://katalog.we-online.de/em/datasheet/6130xx21821.pdf, Gender=Female, Manufacturer URL=http://www.we-online.de, Mounting Technology=THT, Orientation=Vertical, Package Reference=61300821821, Packaging=Tray, Part Number=61300821821, Pin Number=8, Pitch=2.54mm, Publisher=WurthElektronik, Row Number=Dual
J11: library part CMP-1502-01315-1, "THT Vertical Socket Header WR-PHD, Pitch 2.54 mm, Single Row, 3 pins", Contact Resistance=20mOhm, Manufacturer="Wurth Elektronik", Operating Temperature=-40to125degC, Rated Current=3A, Withstanding Voltage=500VAC, Working Voltage=250VAC, Datasheet URL=https://katalog.we-online.de/em/datasheet/6130xx11821.pdf, Gender=Female, Manufacturer URL=http://www.we-online.de, Mounting Technology=THT, Orientation=Vertical, Package Reference=61300311821, Packaging=Tray, Part Number=61300311821, Pin Number=3, Pitch=2.54mm, Publisher=WurthElektronik, Row Number=Single
P1: library part CMP-1502-01064-1, "THT Vertical Pin Header WR-PHD, Pitch 2.54 mm, Single Row, 4 pins", Contact Resistance=20mOhm, Manufacturer="Wurth Elektronik", Operating Temperature=-40to105degC, Rated Current=3A, Withstanding Voltage=500VAC, Working Voltage=250VAC, Datasheet URL=https://katalog.we-online.de/em/datasheet/6130xx11121.pdf, Gender=Male, Manufacturer URL=http://www.we-online.de, Mounting Technology=THT, Orientation=Vertical, Package Reference=61300411121, Packaging=Bag, Part Number=61300411121, Pin Number=4, Pitch=2.54mm, Publisher=WurthElektronik, Row Number=Single
P2 P3: library part CMP-1502-01062-1, "THT Vertical Pin Header WR-PHD, Pitch 2.54 mm, Single Row, 3 pins", Contact Resistance=20mOhm, Manufacturer="Wurth Elektronik", Operating Temperature=-40to105degC, Rated Current=3A, Withstanding Voltage=500VAC, Working Voltage=250VAC, Datasheet URL=https://katalog.we-online.de/em/datasheet/6130xx11121.pdf, Gender=Male, Manufacturer URL=http://www.we-online.de, Mounting Technology=THT, Orientation=Vertical, Package Reference=61300311121, Packaging=Bag, Part Number=61300311121, Pin Number=3, Pitch=2.54mm, Publisher=WurthElektronik, Row Number=Single
P4: library part CMP-1712-00002-4, "THT Vertical Pin Header WR-PHD, Pitch 2.54 mm, Single Row, 2 pins", Contact Resistance=20mOhm, Manufacturer="Wurth Elektronik", Operating Temperature=-40to105degC, Rated Current=3A, Withstanding Voltage=500VAC, Working Voltage=250VAC, Datasheet URL=https://katalog.we-online.de/em/datasheet/6130xx11121.pdf, Gender=Male, Manufacturer URL=http://www.we-online.de, Mounting Technology=THT, Orientation=Vertical, Package Reference=61300211121, Packaging=Bag, Part Number=61300211121, Pin Number=2, Pitch=2.54mm, Publisher=WurthElektronik, Row Number=Single
P5: library part CMP-1502-01072-1, "THT Vertical Pin Header WR-PHD, Pitch 2.54 mm, Dual Row, 6 pins", Contact Resistance=20mOhm, Manufacturer="Wurth Elektronik", Operating Temperature=-40to105degC, Rated Current=3A, Withstanding Voltage=500VAC, Working Voltage=250VAC, Datasheet URL=https://katalog.we-online.de/em/datasheet/6130xx21121.pdf, Gender=Male, Manufacturer URL=http://www.we-online.de, Mounting Technology=THT, Orientation=Vertical, Package Reference=61300621121, Packaging=Bag, Part Number=61300621121, Pin Number=6, Pitch=2.54mm, Publisher=WurthElektronik, Row Number=Dual
P6: library part CMP-1502-01059-1, "THT Angled Pin Header WR-PHD, Pitch 2.54 mm, Single Row, 2 pins", Contact Resistance=20mOhm, Manufacturer="Wurth Elektronik", Operating Temperature=-40to105degC, Rated Current=3A, Withstanding Voltage=500VAC, Working Voltage=250VAC, Datasheet URL=https://katalog.we-online.de/em/datasheet/6130xx11021.pdf, Gender=Male, Manufacturer URL=http://www.we-online.de, Mounting Technology=THT, Orientation=Angled, Package Reference=61300211021, Packaging=Bag, Part Number=61300211021, Pin Number=2, Pitch=2.54mm, Publisher=WurthElektronik, Row Number=Single
P7: library part CMP-1755-00001-1, "Male Header, Pitch 2 mm, 1 x 2 Position, Height 5.5 mm, -25 to 85 degC, RoHS, Tape and Reel", Colour=Black, Current Rating="3 A", Max Operating Temperature=105degC, Min Operating Temperature=-65degC, Package Quantity=100, ComponentLink1Description="Manufacturer URL", ComponentLink1URL=http://www.jst.com/home2.html, ComponentLink2Description=Datasheet, ComponentLink2URL=http://www.jst-mfg.com/product/pdf/eng/ePH.pdf, Contact Finish=Lead, Contact Material=Bronze, Contact Plating=Tin, DatasheetVersion=Dec-12, Height="8.13 mm", Lead Pitch="0.1 inch", Length="101.19 mm", Mount="Through Hole", PackageDescription="Male Header, Pitch 2 mm, 1 x 2 Position, Height 5.5 mm", PackageReference=S2B-PH-SM4-TB(LF)(SN)-2, Packaging=Bulk, Pins=40, Radiation Hardening=No, RoHSCompliant=True, Width="2.34 mm"
Q1 Q2: library part CMP-02550-000156-1, "MOSFET P-CHANNEL 20V 8A 6TSOP", Continuous Drain Current=-7.5A, Drain To Source Breakdown Voltage=-20V, Drain To Source Resistance=0.02Ω, Gate To Source Voltage=8V, Input Capacitace At Vds="1825pF @ -10V", Manufacturer=Vishay, Max Forward Diode Voltage=-1.2V, Max Junction Temp=+150°C, Package=C-06593, Power Dissipation=2W, Pulse Drain Current=-32A, Temperature="-55°C to +150°C", Temperature Range Low=-55°C, Typ Forward Diode Voltage=-0.8V, Automotive=No, Category=Trans, ComponentLink2Description=Datasheet, ComponentLink2URL=https://www.vishay.com/docs/74735/si3493ddv.pdf, Depletion Mode=False, Device Class L1="Discrete Semiconductors", Device Class L2=Transistors, Device Class L3=MOSFETs, Digikey Description="MOSFET P-CHANNEL 20V 8A 6TSOP", Drain To Source Voltage=-20V, Footprint Url=https://www.vishay.com/docs/71200/71200.pdf, Gate Charge At Vgs="34.8nC @ -8V", Height=1.1mm, Lead Free=Yes, Manufacturer Part Number=SI3493DDV-T1-GE3, Number of Channels=1, Number Of P Channels=1, Octopart=https://octopart.com/si3493ddv-t1-ge3-vishay-81014282, Reverse Recovery Charge=34.8nC, Reverse Recovery Time=21ns, RoHS=TRUE, Rthja Max=62.5°C/W, Standoff Height=0.01mm, Temperature Range High=+150°C, Threshold Vgs Max=-1V, Threshold Vgs Min=-0.4V, Transconductance=30S, Turn Off Delay Time=95ns, Turn On Delay Time=25ns
R1 R6 R7 R8 R16 R17: library part CMP-1659-00013-4, "Chip Resistor, 10 KOhm, +/- 1%, 0.125 W, -55 to 155 degC, 0805 (2012 Metric), RoHS, Tape and Reel", Manufacturer=Yageo, Max Operating Temperature="155 degC", Min Operating Temperature="-55 degC", Package Quantity=5000, Voltage Rating="150 V", ComponentLink1Description="Manufacturer URL", ComponentLink1URL=http://www.yageo.com/, ComponentLink2Description=Datasheet, ComponentLink2URL=http://www.yageo.com/documents/recent/PYu-RC_Group_51_RoHS_L_04.pdf, DatasheetVersion="Rev. 4, 02/2016", Height="0.5 mm", Length="2 mm", Mount="Surface Mount", Mounting Technology="Surface Mount", PackageDescription="2-Pin Surface Mounted Device, Body 2 x 1.25 mm", PackageReference=0805, Packaging="Tape and Reel", Pins=2, REACH SVHC="No SVHC", RoHSCompliant=true
R2 R3 R4 R9 R10 R14 R15 R18 R19 R20 R21 R22: library part CMP-2001-04738-1, "TNPW08051K00BEEN", Manufacturer="Vishay Dale", Part Number=TNPW08051K00BEEN
R5: library part CMP-2001-04896-1, Manufacturer="Vishay Dale", Part Number=CRCW08050000Z0EA
R11: library part CMP-2001-00026-5, "Chip Resistor, 2 KOhm, +/- 1%, 0.125 W, -55 to 155 degC, 0805 (2012 Metric), RoHS, Tape and Reel", Manufacturer=Panasonic, Max Operating Temperature="155 degC", Min Operating Temperature="-55 degC", Package Quantity=5000, Voltage Rating="150 V", ComponentLink1Description="Manufacturer URL", ComponentLink1URL=http://www.panasonic.com/, ComponentLink2Description=Datasheet, ComponentLink2URL=http://industrial.panasonic.com/cdbs/www-data/pdf/RDA0000/AOA0000C86.pdf, DatasheetVersion=04/2015, Height="0.6 mm", Length="2 mm", Mount="Surface Mount", Mounting Technology="Surface Mount", PackageDescription="2-Pin Surface Mount Device, Body 2 x 1.25 mm", PackageReference=0805, Packaging="Tape and Reel", REACH SVHC=Unknown, RoHSCompliant=true
R12 R13: library part CMP-2001-00649-1, Manufacturer=Panasonic, Part Number=ERA6AEB512V
R23 R24 R25 R26 R27 R28 R29 R30 R31 R32 R33 R34 R35 R36 R37 R38 R39 R40 R41 R42: library part CMP-2001-04901-1, Manufacturer="Vishay Dale", Part Number=CRCW0805100RFKEA
U1: library part CMP-0395-00126-2, "Single Output Fast Transient Response LDO, 1 A, Fixed 3.3 V Output, 2.7 to 10 V Input, with Low IQ, 8-pin SOIC (D), -40 to 125 degC, Green (RoHS & no Sb/Br)", Manufacturer="Texas Instruments", Accuracy(%)=2, Code_JEDEC=MS-012, ComponentLink1Description="Manufacturer URL", ComponentLink1URL=http://www.ti.com/, ComponentLink2Description=Datasheet, ComponentLink2URL=http://www.ti.com/general/docs/lit/getliterature.tsp?genericPartNumber=TPS76733&fileType=pdf, ComponentLink3Description="Package Specification", ComponentLink3URL=http://www.ti.com/litv/pdf/msoi002j, DatasheetVersion=SLVS208I, Eco-Plan="Green (RoHS & no Sb/Br)", Fixed Output Options(V)=3.3, Iout(Max)(A)=1, Iq(Typ)(mA)=0.08, Mounting Technology="Surface Mount", PackageDescription="8-Pin Plastic Small Outline, Body 4.9 x 3.9 mm, Pitch 1.27 mm", PackageReference=D0008A, PackageVersion=4040047-3/M, PartNumber=TPS76733QDR, SubFamily="Single Channel LDO", Vdo(Typ)(mV)=350, Vin(Max)(V)=10, Vin(Min)(V)=2.7, Vout Adj(Max)(V)=3.3, Vout Adj(Min)(V)=3.3
U2: library part CMP-0133-00182-1, "Stand-Alone Linear Li-Ion/Li-Polymer Charge Management Controller with Power-Good Output, 4.2V, 10-Pin MSOP, Industrial Temperature", DatasheetVersion="revB, May-2009", PackageDescription="10-Lead Plastic Micro Small Outline Package (UN) [MSOP]", PackageReference=MSOP-UN10, PackageVersion="revBB, Aug-2009"

## Via types
v1: diameter 28, hole 14, Top Layer to Bottom Layer, tented both sides, 126 vias

## Nets (pads, with @x,y where several pads share a name; then routed paths per layer and width w, separated by ;. In a path a pad name is that pad's centre, name@x,y a point inside that pad or via, vN(x,y) a via of type N, cw(c..) or ccw(c..) an arc to the next point about the centre after c; other vN are vias at no path point)
1V_REF: J3.5 J7.4 | length 685.9
  Bottom Layer w10: J3.5 250,1127.87 291.57,1169.45 479.34,1169.45 593.75,1055.04 674.98,1055.04 711,1019.02 711,955.58 693.07,937.65 J7.4@693.07,921.92 ; J7.4@680.25,911.55 683.69,908.11 J7.4
2V_REF: J3.6 J7.3 | length 453.4
  Top Layer w10: v1(250,991.26) 250,940.74 270.19,920.55 416.66,920.55 492.93,844.28 J7.3
3V3: C2.1 D1.2 D2.2 J3.3 J3.4 J6.1 J7.5 J7.7 P5.2 R1.2 R2.2 R16.2 U1.5 U1.6 | length 3777
  Top Layer w10: P5.2 -719.36,-640.98 -738.48,-621.86 -738.48,-459.58 -597.55,-318.65 v1(-387.5,-318.65) ; v1(438.28,-260.81) 438.28,-258.12 457.43,-238.96 457.43,-207.47 R2.2
  Top Layer w30: D1.2 485.44,-94.39 488.44,-91.39 522.18,-91.39 549.64,-63.93 549.64,3.86 547.43,6.06 U1.5 U1.6@532.16,53.4 ; D1.2@488.44,-100.59 488.44,-168.59 470.15,-186.88 R2.2 566.12,-194.76 570.8,-199.44 R1.2 575.49,-199.44 575.49,-232.94 629.16,-286.6 656.91,-286.6 659.91,-289.6 D2.2 ; U1.6 578.93,56.06 596.5,73.64 596.5,296.5 J6.1@800,500
  Bottom Layer w10: v1(-387.5,-318.65) -324.94,-318.65 R16.2 -321.26,-308.08 -273.99,-260.81 v1(438.28,-260.81)
  Bottom Layer w30: J3.3 J3.4 300,923.57 450,773.57 J7.5 ; J7.5@689.24,768.01 J7.7 ; J7.7@754.71,703.17 810,647.88 J6.1@810,492.42
!ADC_CS: J3.21 P3.2 R39.2 | length 737.4
  Top Layer w10: v1(-150,1098.74) -150,1015.62 29.63,835.99 193.05,835.99 P3.2
  Bottom Layer w10: R39.2 203.6,654.61 215.34,666.35 215.34,712.61 260.94,758.21 P3.2
!CHIP_EN: J4.19 R16.1 R28.1 | length 775
  Bottom Layer w10: R28.1 -289.52,-652.27 -247.08,-609.83 -247.08,-318.28 R16.1 ; R28.1@-283.43,-658.37 -277.79,-664.01 -277.71,-664.01 -200,-741.72 -200,-823.07 -100,-923.07 J4.19
!DAC_CS: J3.23 P3.1 R35.2 | length 894.5
  Top Layer w10: v1(-200,1098.79) -242.83,1055.95 -242.83,960.41 -50.53,768.1 P3.1 ; P3.1@142.46,766.42 P3.1@160.46,748.42
  Bottom Layer w10: R35.2 6.44,661.31 6.44,698.32 76.23,768.1 P3.1
!GATE_SHDN: J3.25 R37.2 | length 668.3
  Top Layer w10: v1(-250,1098.74) -250,1098.45 -264.57,1083.88 -264.57,956.69 -56.3,748.42 56.06,748.42 89.57,714.91 89.57,703.14 v1(93.01,699.69)
  Bottom Layer w10: v1(93.01,699.69) 93.01,664.53 R37.2
!PG: DS5.2 R10.2 U2.7 | length 2037.7
  Top Layer w10: v1(-544.99,235.16) -573.33,206.82 R10.2 -573.33,169 -546.3,141.98 U2.7 ; v1(950.06,628.65) 982.23,660.83 DS5.2
  Bottom Layer w10: v1(-544.99,235.16) -524.82,215 55.84,215 127.07,286.23 833.67,286.23 926.52,379.08 926.52,605.11 v1(950.06,628.65)
+11V: J4.13 J13.1 | length 140.1
  Bottom Layer w10: J13.1 50,-861.61 J4.13
-11V: J4.14 J13.2 | length 282.9
  Top Layer w10: v1(50,-1098.74) 50,-946.8 J13.2
BATT_LVL: J5.17 R18.1 R19.2 | length 352.2
  Top Layer w10: J5.17@-800,-500 J5.17@-792.61,-492.61 ; J5.17@-792.61,-525.8 J5.17@-792.61,-492.61 ; J5.17@-792.61,-479.73 J5.17@-792.61,-492.61 ; J5.17@-790.46,-490.46 J5.17@-792.61,-492.61
  Bottom Layer w10: J5.17 -790,-376.72 -743.99,-330.71 R19.2 R18.1
BLUE_STAT: P1.4 R9.1 | length 1062.3
  Top Layer w10: P1.4 -739.59,828.29 -739.59,458.74 -695.92,415.07 -257.34,415.07 -165.98,323.71 R9.1
DRAIN_SEL0: J4.22 R38.1 | length 675.8
  Top Layer w10: v1(-150,-1098.74) -150,-878.86 -27.91,-756.77 106.01,-756.77 v1(160.94,-701.84)
  Bottom Layer w10: v1(160.94,-701.84) 180.86,-681.92 180.86,-664.86 192.6,-653.13 R38.1
DRAIN_SEL1: J4.18 R40.1 | length 719.6
  Top Layer w10: v1(-50,-1098.74) -50,-1098.45 -83.43,-1065.02 -83.43,-849.9 -19.53,-786.01 179.43,-786.01 248.16,-717.28 248.16,-705.29 v1(251.61,-701.84)
  Bottom Layer w10: v1(251.61,-701.84) R40.1@289.44,-664.01
DRAIN_SEL2: J4.24 R36.1 | length 634.5
  Top Layer w10: v1(-200,-1098.74) -233.43,-1065.32 -233.43,-917.12 -43.02,-726.72 15,-726.72 v1(41.74,-699.98)
  Bottom Layer w10: v1(41.74,-699.98) 45.18,-696.54 50.64,-696.54 93.02,-654.15 R36.1@96.73,-654.15
DRAIN_SEL3: J3.15 R41.2 | length 947.9
  Top Layer w10: v1(0,1098.74) -50,1048.74 -50,966.53 44.54,871.99 351.58,871.99 424.72,798.86 424.72,722.26 395.41,692.95 v1(301.03,692.95)
  Bottom Layer w10: R41.2 v1(301.03,692.95)
DRAIN_SEL4: J3.18 R31.2 | length 391.4
  Bottom Layer w10: R31.2@-181.98,654.54 -100.66,735.87 -100.66,838.88 -80.11,859.43 -80.11,932.02 -50,962.13 J3.18
EN: C3.2 J5.18 | length 137.4
  Top Layer w10: J5.18@-901.37,-524.09 J5.18@-901.37,-501.43
  Bottom Layer w10: C3.2 -903.7,-393 -890,-406.7 J5.18
GATE1: J4.9
GATE2: J4.10
GATE3: J4.5
GATE4: J4.6
GATE5: J4.3
GATE6: J4.4
GATE_AMP: J4.21 R27.1 | length 477.1
  Bottom Layer w10: R27.1 -386.64,-652.28 -374.91,-664.01 -374.91,-673.85 -366.75,-682.01 -315.1,-682.01 -229.96,-767.15 -229.96,-854.03 -150,-933.99 J4.21
GATE_AMP2: J3.29 R33.2 | length 572.6
  Top Layer w10: v1(-350,1098.74) -350,1058.94 -300,1008.94 -300,957.31 -70.85,728.16 -70.85,708.85 v1(-70,708)
  Bottom Layer w10: R33.2 -90.17,664.39 -90.17,682.96 -70,703.13 v1(-70,708)
GND: C1.1 C2.2 C3.1 C4.1 C5.1 C6.2 C7.2 D3.2 D4.2 DS1.2 DS4.2 J1.1 J1.2 J1.3 J1.4 J1.5 J1.6 J1.A1 J1.A12 J1.B1 J1.B12 J3.1 J3.2 J3.7 J3.8 J3.11 J3.13 J3.14 J3.16 J3.19 J3.24 J3.27 J4.1 J4.2 J4.7 J4.8 J4.11 J4.12 J4.15 J4.16 J4.20 J4.23 J4.28 J5.2 J7.1 J7.2 P5.4 P5.6 P6.2 P7.1 R6.1 R7.1 R8.1 R11.1 R12.1 R13.1 R19.1 R21.2 U1.1 U1.2 U2.5 | length 1433.4
  Top Layer w10: DS4.2@-1031.54,-636.72 DS4.2@-1031.54,-627.68 ; DS4.2 -1002.42,-630.51 -995.46,-623.55 DS1.2 ; v1(-670.76,-120.51) -669.84,-121.43 R8.1 ; -386.37,163.28 -384.76,161.67 U2.5@-348.19,161.67 ; R11.1 -371.94,250.2 -371.94,219.01 -348.27,195.34 -348.27,161.74 U2.5@-348.19,161.67 ; U2.5 U2.5@-348.19,161.67 ; v1(-97.83,111.35) -97.28,111.9 R6.1 ; R7.1 163.41,-93.36 165.43,-91.34 C6.2@165.43,-73.8 ; J1.6 523.67,-849.36 532.91,-849.36 537.4,-844.88 538.68,-844.88 J1.B1 568.74,-874.95 ; J1.4 568.74,-874.95 ; J1.2 618.8,-944.49 618.8,-925 J1.A12 568.74,-874.95 ; C2.2 625.92,-59.89 676.18,-9.64 P6.2 ; J1.5 671.75,-670.44 J1.B12@701.48,-700.17 ; J1.B12 721.86,-721.83 ; J1.3 721.86,-721.83 ; J1.1 766.93,-747.42 757.69,-747.42 753.2,-751.9 751.92,-751.9 J1.A1 721.86,-721.83
  Bottom Layer w10: C3.1 v1(-854.76,-333.9) v1(-854.76,-333.9) -849.89,-333.9 -838.83,-322.84 R19.1 ; v1(-680.92,-358.18) -676.05,-358.18 -664.33,-346.46 -633.01,-346.46 C7.2 ; v1(-369.02,-201.6) -352.79,-185.38 R21.2 ; R12.1 R13.1
  other v1: -300,-1098.74 -100,-1098.74 0,-1098.74 100,-1098.74 200,-1098.74 350,-1098.74 -200,-991.26 0,-991.26 100,-991.26 200,-991.26 350,-991.26 276.78,-731.92 185.43,-730.89 68.55,-724.89 -104.39,-703.98 -43.02,-649.85 473.38,-648.03 -954.29,-623.55 -972.4,-297.57 -922.38,-297.57 797.04,-148.21 130.56,-93.36 403.26,3.2 457.92,3.2 376.88,38.41 -425.74,39.06 -362.75,39.06 424.72,39.06 -394.13,50.71 -1035.39,64.99 -986.18,65.53 -939.22,65.53 -427.77,71 401.25,81.06 454.38,81.06 -397.56,92.77 378.48,111.06 424.72,111.9 -422.27,122.3 -391.88,136.77 403.26,147.23 459.71,147.23 -1157.01,289.07 -364.1,315.84 -477.99,326.98 -412.52,326.98 -611.01,330.26 -546.94,331.81 -384.7,356.57 -444.8,359.65 -577,363.28 -514,363.28 56.06,694 264.57,694 -33.43,706.24 -200,991.26 0,991.26 50,991.26 200,991.26 350,991.26 -300,1098.74 -100,1098.74 50,1098.74 100,1098.74 200,1098.74 350,1098.74
GPIO0: J3.17 P3.3 R42.2 | length 806.6
  Top Layer w10: v1(-50,1098.74) -50,1093.87 -68,1075.87 -68,959.08 37.08,853.99 275.05,853.99 P3.3
  Bottom Layer w10: P3.3 371.08,757.96 390.02,757.96 408.69,739.29 408.69,666.28 400.9,658.48 R42.2@393.21,658.48
GPIO35: J4.25 J9.2 R25.1 | length 504
  Bottom Layer w10: R25.1 -495.26,-652.27 -483.53,-664.01 -483.53,-678.15 -457.7,-703.98 -350.65,-703.98 -303.21,-751.41 -303.21,-866.95 -250,-920.16 J4.25
GREEN_STAT: P1.3 R3.1 R4.1 | length 1300
  Top Layer w10: P1.3 -708.02,622.25 -638.92,553.15 -638.92,458.53 -613.46,433.07 -209.64,433.07 -125.27,348.7 -125.27,272.45 -166.49,231.23 R3.1 -165.98,222.85 R4.1
LOW_BATT: J4.29 J5.16 R1.1 U1.8 | length 2682.7
  Top Layer w10: J5.16 -565.7,-375.7 640.2,-375.7 700.84,-315.06 700.84,-260.81 641.67,-201.65 641.67,-187.87 680.24,-149.3 680.24,-134.2 v1(683.69,-130.76)
  Bottom Layer w10: J5.16 -690,-649.85 -387.3,-952.56 -359.57,-952.56 -350,-962.13 J4.29 ; v1(532.16,147.23) 532.16,20.77 v1(683.69,-130.76)
MISO: J3.22 J6.13 P2.2 | length 608.2
  Bottom Layer w10: J6.13@-409.54,491.47 -409.54,658.57 -318.13,749.97 P2.2 ; P2.2@-298.44,766.55 -150,914.99 J3.22
MOSI: J3.30 P2.1 R23.2 | length 854.5
  Top Layer w10: P2.1 -400,941.26 v1(-350,991.26)
  Bottom Layer w10: R23.2@-806.02,657.37 -808.84,654.54 R23.2 -785.8,666.28 -773.01,666.28 -739.59,699.69 -671.17,699.69 -403.32,967.55 -359.57,967.55 -350,977.12 v1(-350,991.26)
NetDS2_1: DS2.1 R14.1 | length 1349.2
  Top Layer w10: R14.1 -135.26,6.98 v1(-89.2,6.98) ; v1(1020.98,308.66) 1024.42,312.1 1042.81,312.1 1069.15,338.44 DS2.1
  Bottom Layer w10: v1(-89.2,6.98) 18.12,114.3 31.51,114.3 149.43,232.23 944.55,232.23 v1(1020.98,308.66)
NetDS3_1: DS3.1 R15.1 | length 1596.1
  Top Layer w10: R15.1 -135.22,-81.99 v1(-104.39,-81.99) ; DS3.1 1067.11,466.43 v1(1104.34,429.2)
  Bottom Layer w10: v1(-104.39,-81.99) -104.39,-52.05 161.89,214.23 986.91,214.23 1121,348.31 1121,412.54 v1(1104.34,429.2)
NetDS5_1: DS5.1 R22.1 | length 1872.3
  Top Layer w10: R22.1 -137.68,-168.18 v1(-73.39,-168.18) ; DS5.1 1055.13,602.36 v1(1104.34,553.15)
  Bottom Layer w10: v1(-73.39,-168.18) -73.39,-46.51 169.34,196.23 1000.23,196.23 1150,346 1150,507.49 v1(1104.34,553.15)
NetF2_1: F2.1 J1.A4 J1.A9 J1.B4 J1.B9 | length 475.1
  Top Layer w10: J1.B4 J1.A9 666.76,-889.45 797.02,-889.45 F2.1 808.16,-891.65 J1.A4 J1.B9
NetJ1_A5: J1.A5 R12.2 | length 375
  Top Layer w10: J1.A5 722.31,-833.64 722.31,-850.76 v1(725.75,-854.21)
  Bottom Layer w10: R12.2 484.91,-720.02 505.67,-720.02 510.55,-724.89 596.44,-724.89 v1(725.75,-854.21)
NetJ1_B5: J1.B5 R13.2 | length 273.1
  Top Layer w10: v1(602.3,-615.86) 575.56,-642.59 575.56,-770.41 J1.B5
  Bottom Layer w10: R13.2 563.47,-654.68 v1(602.3,-615.86)
NetJ5_6: J5.6 R40.2 | length 87.3
  Bottom Layer w10: R40.2@308.99,-579.22 J5.6@308.99,-491.9
NetJ5_7: J5.7 R38.2 | length 87.3
  Bottom Layer w10: R38.2@194.75,-577.34 J5.7@194.75,-490.02
NetJ5_8: J5.8 R36.2 | length 87.5
  Bottom Layer w10: R36.2@102.01,-576.93 J5.8@102.01,-489.45
NetJ5_9: J5.9 R34.2 | length 87.3
  Bottom Layer w10: R34.2@0,-582.92 J5.9@0,-495.6
NetJ5_10: J5.10 R32.2 | length 102.8
  Bottom Layer w10: J5.10@-100,-500 -100,-579.52 R32.2@-93.07,-586.44 ; R32.2@-86.15,-582.51 R32.2@-72.68,-582.51
NetJ5_11: J5.11 R30.2 | length 87.3
  Bottom Layer w10: R30.2@-196.49,-576.49 J5.11@-196.49,-489.17
NetJ5_12: J5.12 R28.2 | length 87.3
  Bottom Layer w10: R28.2@-293.13,-588.66 J5.12@-293.13,-501.36
NetJ5_13: J5.13 R27.2 | length 87.3
  Bottom Layer w10: R27.2@-396.48,-585.1 J5.13@-396.48,-497.78
NetJ5_14: J5.14 R25.2 | length 87.3
  Bottom Layer w10: R25.2@-496.01,-585.99 J5.14@-496.01,-498.68
NetJ6_5: J6.5 R42.1 | length 93.5
  Bottom Layer w10: J6.5@402.17,492.97 R42.1@402.17,586.49
NetJ6_6: J6.6 R41.1 | length 93.5
  Bottom Layer w10: J6.6@301.03,493.54 R41.1@301.03,587.06
NetJ6_7: J6.7 R39.1 | length 93.5
  Bottom Layer w10: J6.7@198.68,492.3 R39.1@198.68,585.82
NetJ6_8: J6.8 R37.1 | length 93.5
  Bottom Layer w10: J6.8@100,499.41 R37.1@100,592.93
NetJ6_9: J6.9 R35.1 | length 109.6
  Bottom Layer w10: J6.9@0,500 0,588.46 1.23,588.46 14.41,601.64 R35.1@14.41,602.87
NetJ6_10: J6.10 R33.1 | length 88.7
  Bottom Layer w10: J6.10@-100,500 R33.1@-100,588.74
NetJ6_11: J6.11 R31.1 | length 93.5
  Bottom Layer w10: J6.11@-198.44,498.72 R31.1@-198.44,592.24
NetJ6_12: J6.12 R29.1 | length 86.1
  Bottom Layer w10: R29.1@-301.85,585.36 -301.85,501.85 J6.12@-300,500
NetJ6_14: J6.14 R26.1 | length 90.7
  Bottom Layer w10: R26.1 -502.69,502.69 J6.14@-500,500
NetJ6_17: J6.17 R24.1 | length 186
  Bottom Layer w10: J6.17@-796.91,496.09 -714.24,578.76 R24.1@-645.18,578.76
NetJ6_18: J6.18 R23.1 | length 163.5
  Bottom Layer w10: J6.18@-894.04,501.31 -894.04,540.56 -848.77,585.82 R23.1@-788.49,585.82
NetP4_2: P4.2 Q1.4 | length 1606.2
  Top Layer w30: v1(90.87,293.87) 91.07,293.87 107.72,277.23 Q1.4
  Bottom Layer w30: -964.76,404.28 -984.13,404.28 -1023.06,443.2 -1023.06,506.09 -894.05,635.1 P4.2 ; -953.86,404.28 -19.53,404.28 v1(90.87,293.87)
NetP6_1: P6.1 R5.2 R8.2 | length 1633.7
  Top Layer w10: R8.2 R8.2@-552.84,-114.54 ; R5.2 -552.84,-38.6 R8.2@-552.84,-114.54 ; v1(-263.93,-186.88) -366.76,-84.05 -522.35,-84.05 R8.2@-552.84,-114.54
  Bottom Layer w10: v1(-263.93,-186.88) -229.48,-221.33 -82.7,-221.33 -28.21,-166.85 -28.21,-40.8 190.81,178.23 648.7,178.23 P6.1
NetR5_1: R5.1 U2.8 | length 341.2
  Top Layer w10: v1(-674.54,-42.85) -622.05,-42.85 R5.1 ; v1(-575.01,103.12) -572.35,103.12 -553.18,122.3 U2.8
  Bottom Layer w10: v1(-674.54,-42.85) -672.15,-40.45 -672.15,-7.77 -672.15,5.99 v1(-575.01,103.12)
NetR11_2: R11.2 U2.6 | length 122.6
  Top Layer w10: U2.6 -465.63,161.67 -440.83,186.46 R11.2@-440.83,250.53
ON_LED_HI: DS1.1 P5.3 R2.1 | length 1956.7
  Top Layer w10: P5.3 -805.38,-919.36 -863.61,-861.12 -863.61,-717.96 DS1.1 -827.65,-664.4 -813.29,-650.04 -813.29,-619.02 -845.01,-587.3 -845.01,-478.43 -634.2,-267.62 -47.89,-267.62 24.98,-194.76 R2.1
RAW_SCAN: P5.1 R17.1 R20.2 R21.1 | length 1034.4
  Bottom Layer w10: P5.1 -790.07,-809.78 -764.84,-784.55 -764.84,-579.51 -738.48,-553.15 -738.48,-446.4 -711.92,-419.85 -711.92,-315.43 -632.38,-235.89 R17.1 -632.38,-222.11 -599.7,-189.42 -462.08,-189.42 R20.2@-419.32,-232.19 ; R20.2 R20.2@-419.32,-232.19 ; R21.1 -419.32,-149.57 R20.2@-419.32,-232.19
RED_STAT: P1.2 R10.1 | length 1055.7
  Top Layer w10: P1.2 -723.33,1008.85 -845.01,887.17 -845.01,395.41 -634.35,184.75 R10.1
SCAN: C7.1 J4.27 J5.15 R17.2 | length 930.1
  Top Layer w10: J5.15@-600,-500 J5.15@-590.46,-490.46
  Bottom Layer w10: J5.15@-595,-505 -553.18,-546.82 -553.18,-752.32 -444.37,-861.12 -401.01,-861.12 -300,-962.13 J4.27 ; J5.15 -590,-370.38 -566.08,-346.46 C7.1 -561.52,-334.02 R17.2
SCAN_LED_HI: DS4.1 P5.5 R20.1 | length 1453.3
  Top Layer w10: DS4.1 -970.3,-784.44 -738.48,-1016.26 -689.6,-1016.26 -663.4,-990.07 P5.5 -523.95,-990.07 -496.01,-962.13 -496.01,-755.6 -540.07,-711.53 -540.07,-458.04 v1(-488.73,-406.7)
  Bottom Layer w10: v1(-488.73,-406.7) -488.73,-248.45 R20.1
SCK: J3.20 P2.3 R29.2 | length 413.7
  Bottom Layer w10: R29.2@-293.13,658.48 -293.13,660.83 -291.62,662.34 -291.62,676.48 P2.3 ; P2.3@-198.44,766.55 -100,864.99 J3.20
SOURCE_SEL0: J3.26 R26.2 | length 501.1
  Bottom Layer w10: R26.2 -507.42,654.54 -519.15,666.28 -519.15,766.93 -396.24,889.84 -322.29,889.84 -250,962.13 J3.26
SOURCE_SEL1: J3.28 R24.2 | length 536.8
  Bottom Layer w10: R24.2 -647.15,654.54 -635.42,666.28 -635.42,690.31 -410.74,914.99 -331.38,914.99 -307.3,939.08 -307.3,983.96 J3.28
SOURCE_SEL2: J4.17 R30.1 | length 404.4
  Bottom Layer w10: R30.1 -188.37,-652.27 -176.64,-664.01 -176.64,-796.84 -50,-923.47 J4.17
SOURCE_SEL3: J4.30 R32.1 | length 558.7
  Top Layer w10: v1(-350,-1098.74) -350,-934.88 -143.35,-728.22 v1(-143.35,-696.25)
  Bottom Layer w10: v1(-143.35,-696.25) -143.35,-692.7 -102.92,-652.27 R32.1
SOURCE_SEL4: J4.26 R34.1 | length 574
  Top Layer w10: v1(-250,-1098.74) -250,-1098.45 -264.57,-1083.88 -264.57,-912.27 v1(-45,-692.7)
  Bottom Layer w10: v1(-45,-692.7) -41.56,-689.26 -36.42,-689.26 -0.29,-653.13 R34.1
STAT1: DS2.2 R4.2 U2.3 | length 1548.2
  Top Layer w10: U2.3 -238.07,122.3 R4.2@-227.51,132.85 ; v1(-227.51,74.69) R4.2@-227.51,132.85 ; R4.2 R4.2@-227.51,132.85 ; v1(981.63,350.23) 1012.77,381.38 DS2.2
  Bottom Layer w10: v1(-227.51,74.69) -138.02,164.18 55.93,164.18 141.98,250.23 881.62,250.23 v1(981.63,350.23)